# Altium PCB BCM_ECU_revA_V3.PcbDoc (part 1 of 7)
Units mm, origin at the board's own origin, x right, y up, seen from the top; angles counter-clockwise.
Board outline 109.5 x 156 mm, 4 copper layers (TOP SIG, GND, PWR, BOT SIG), stack 0.603 mm thick; 580 components, 446 nets, 1965 pads, 870 vias.
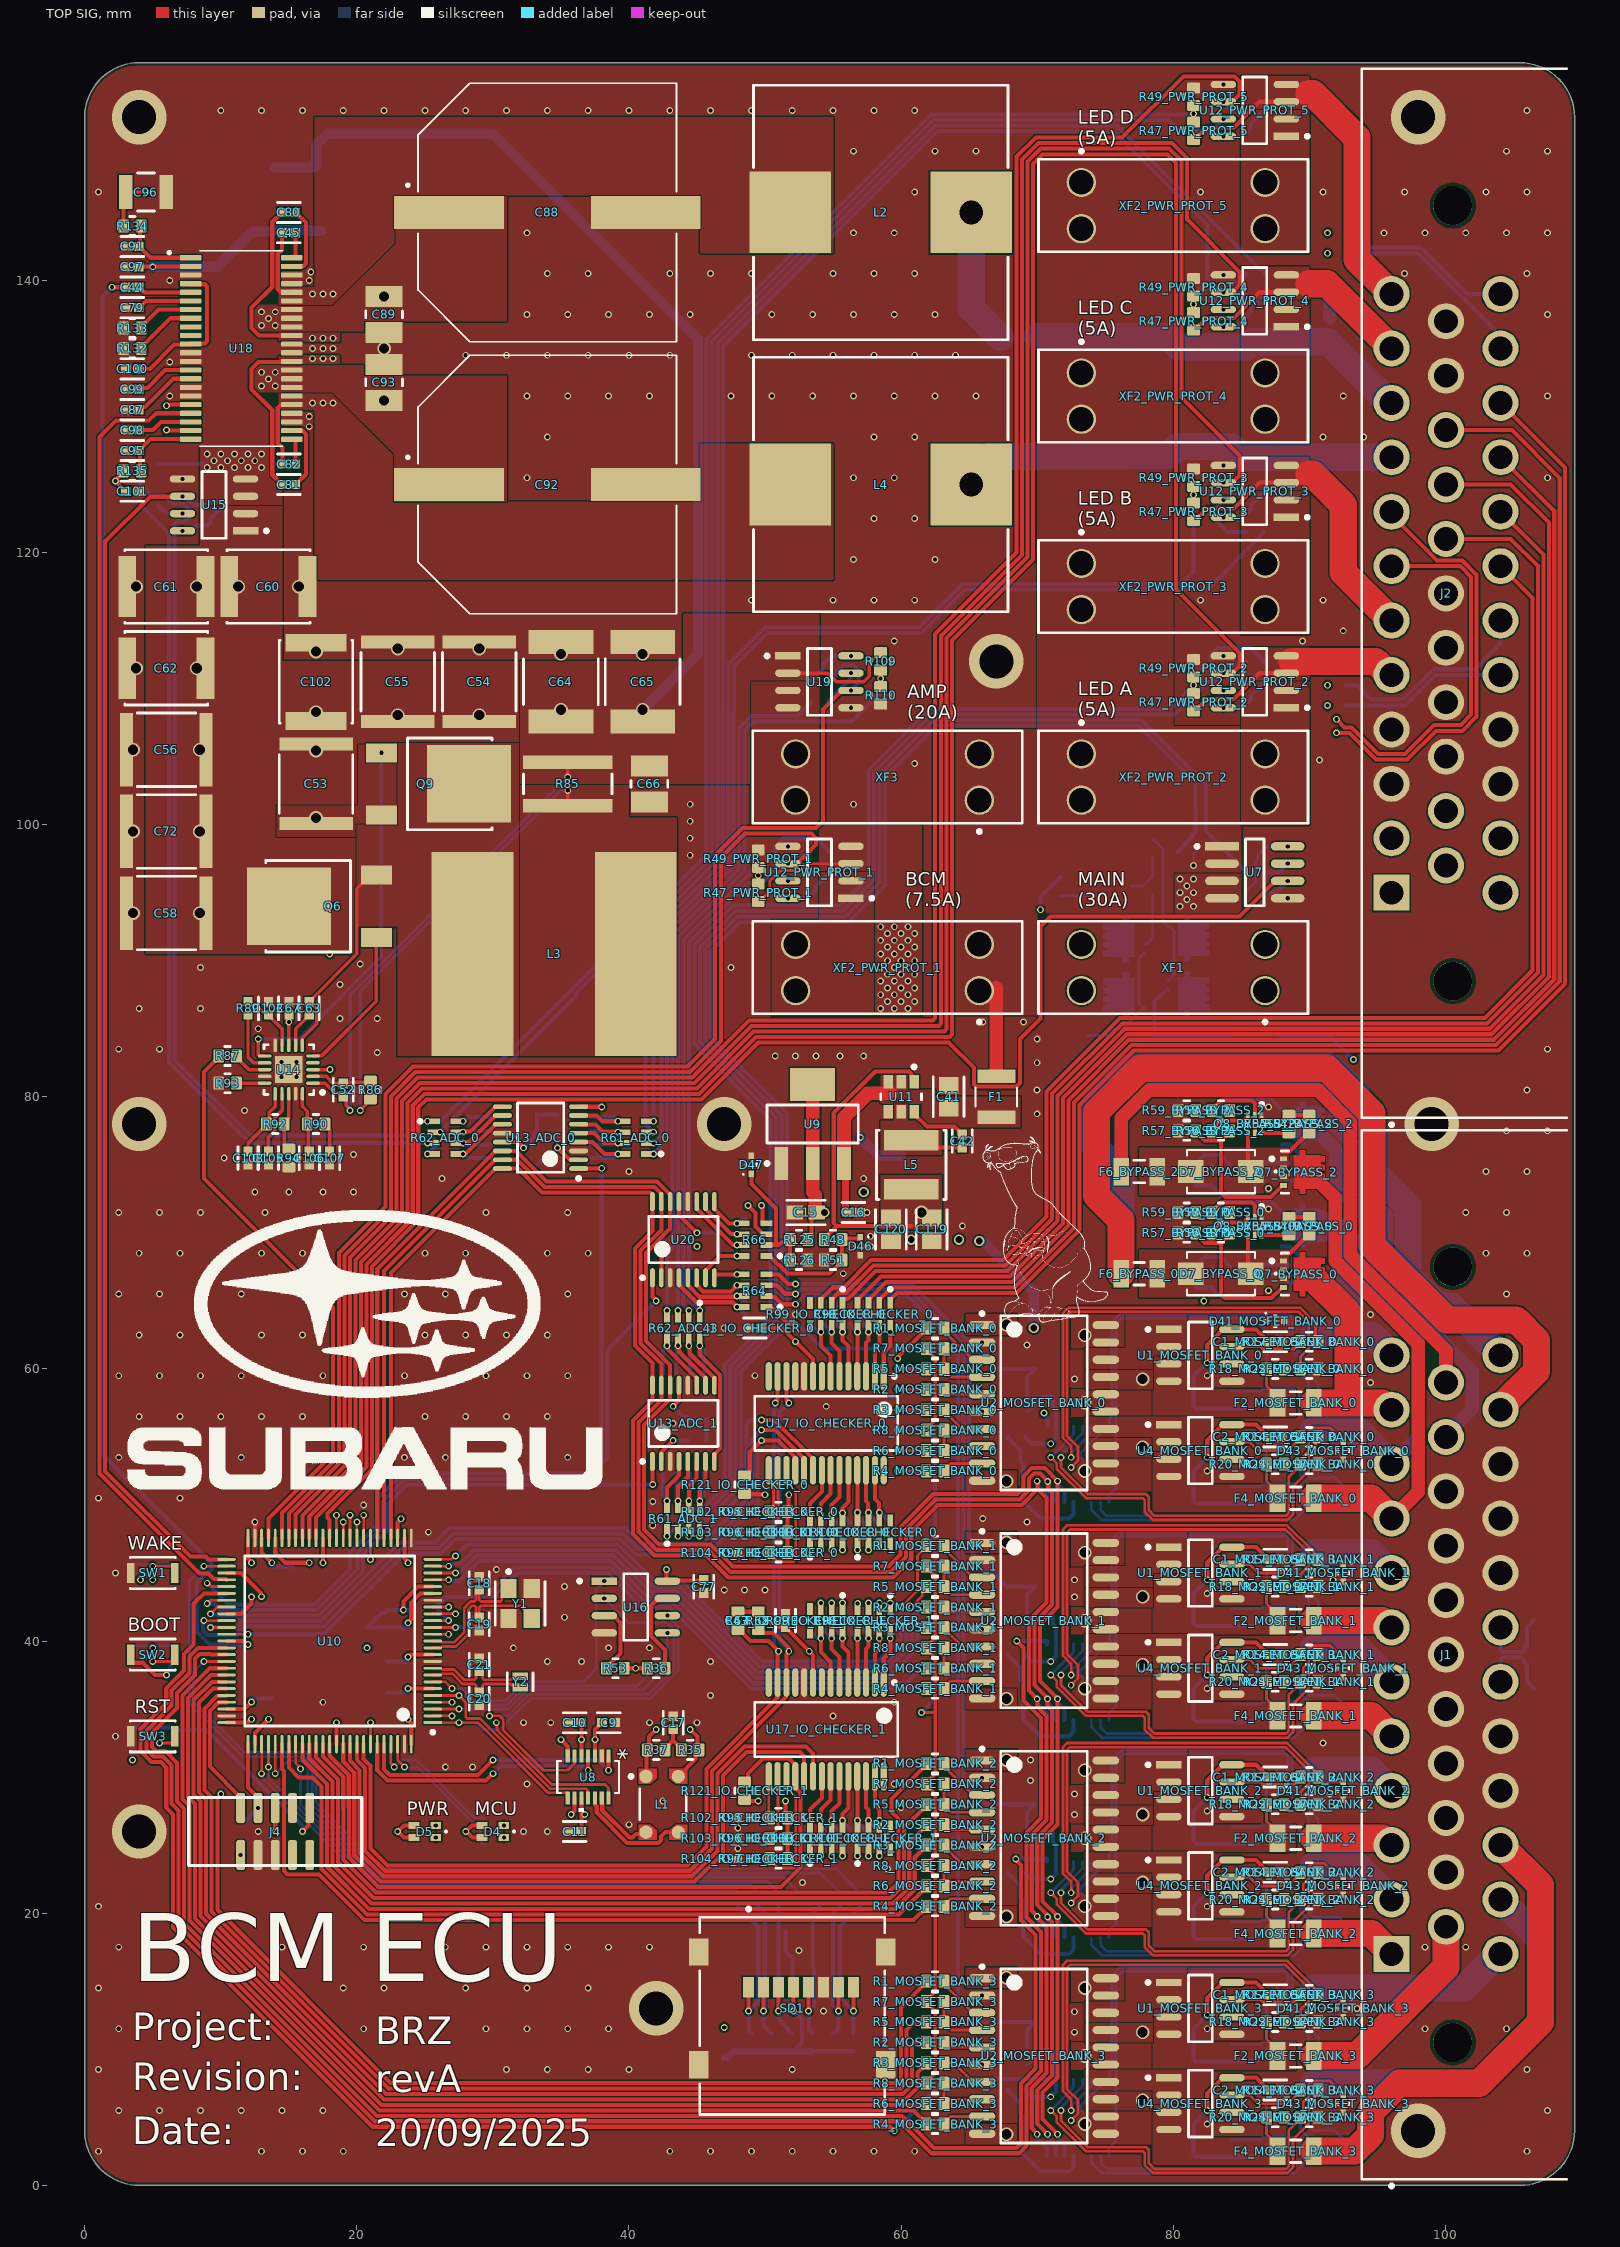
[diagram p0: TOP SIG view]
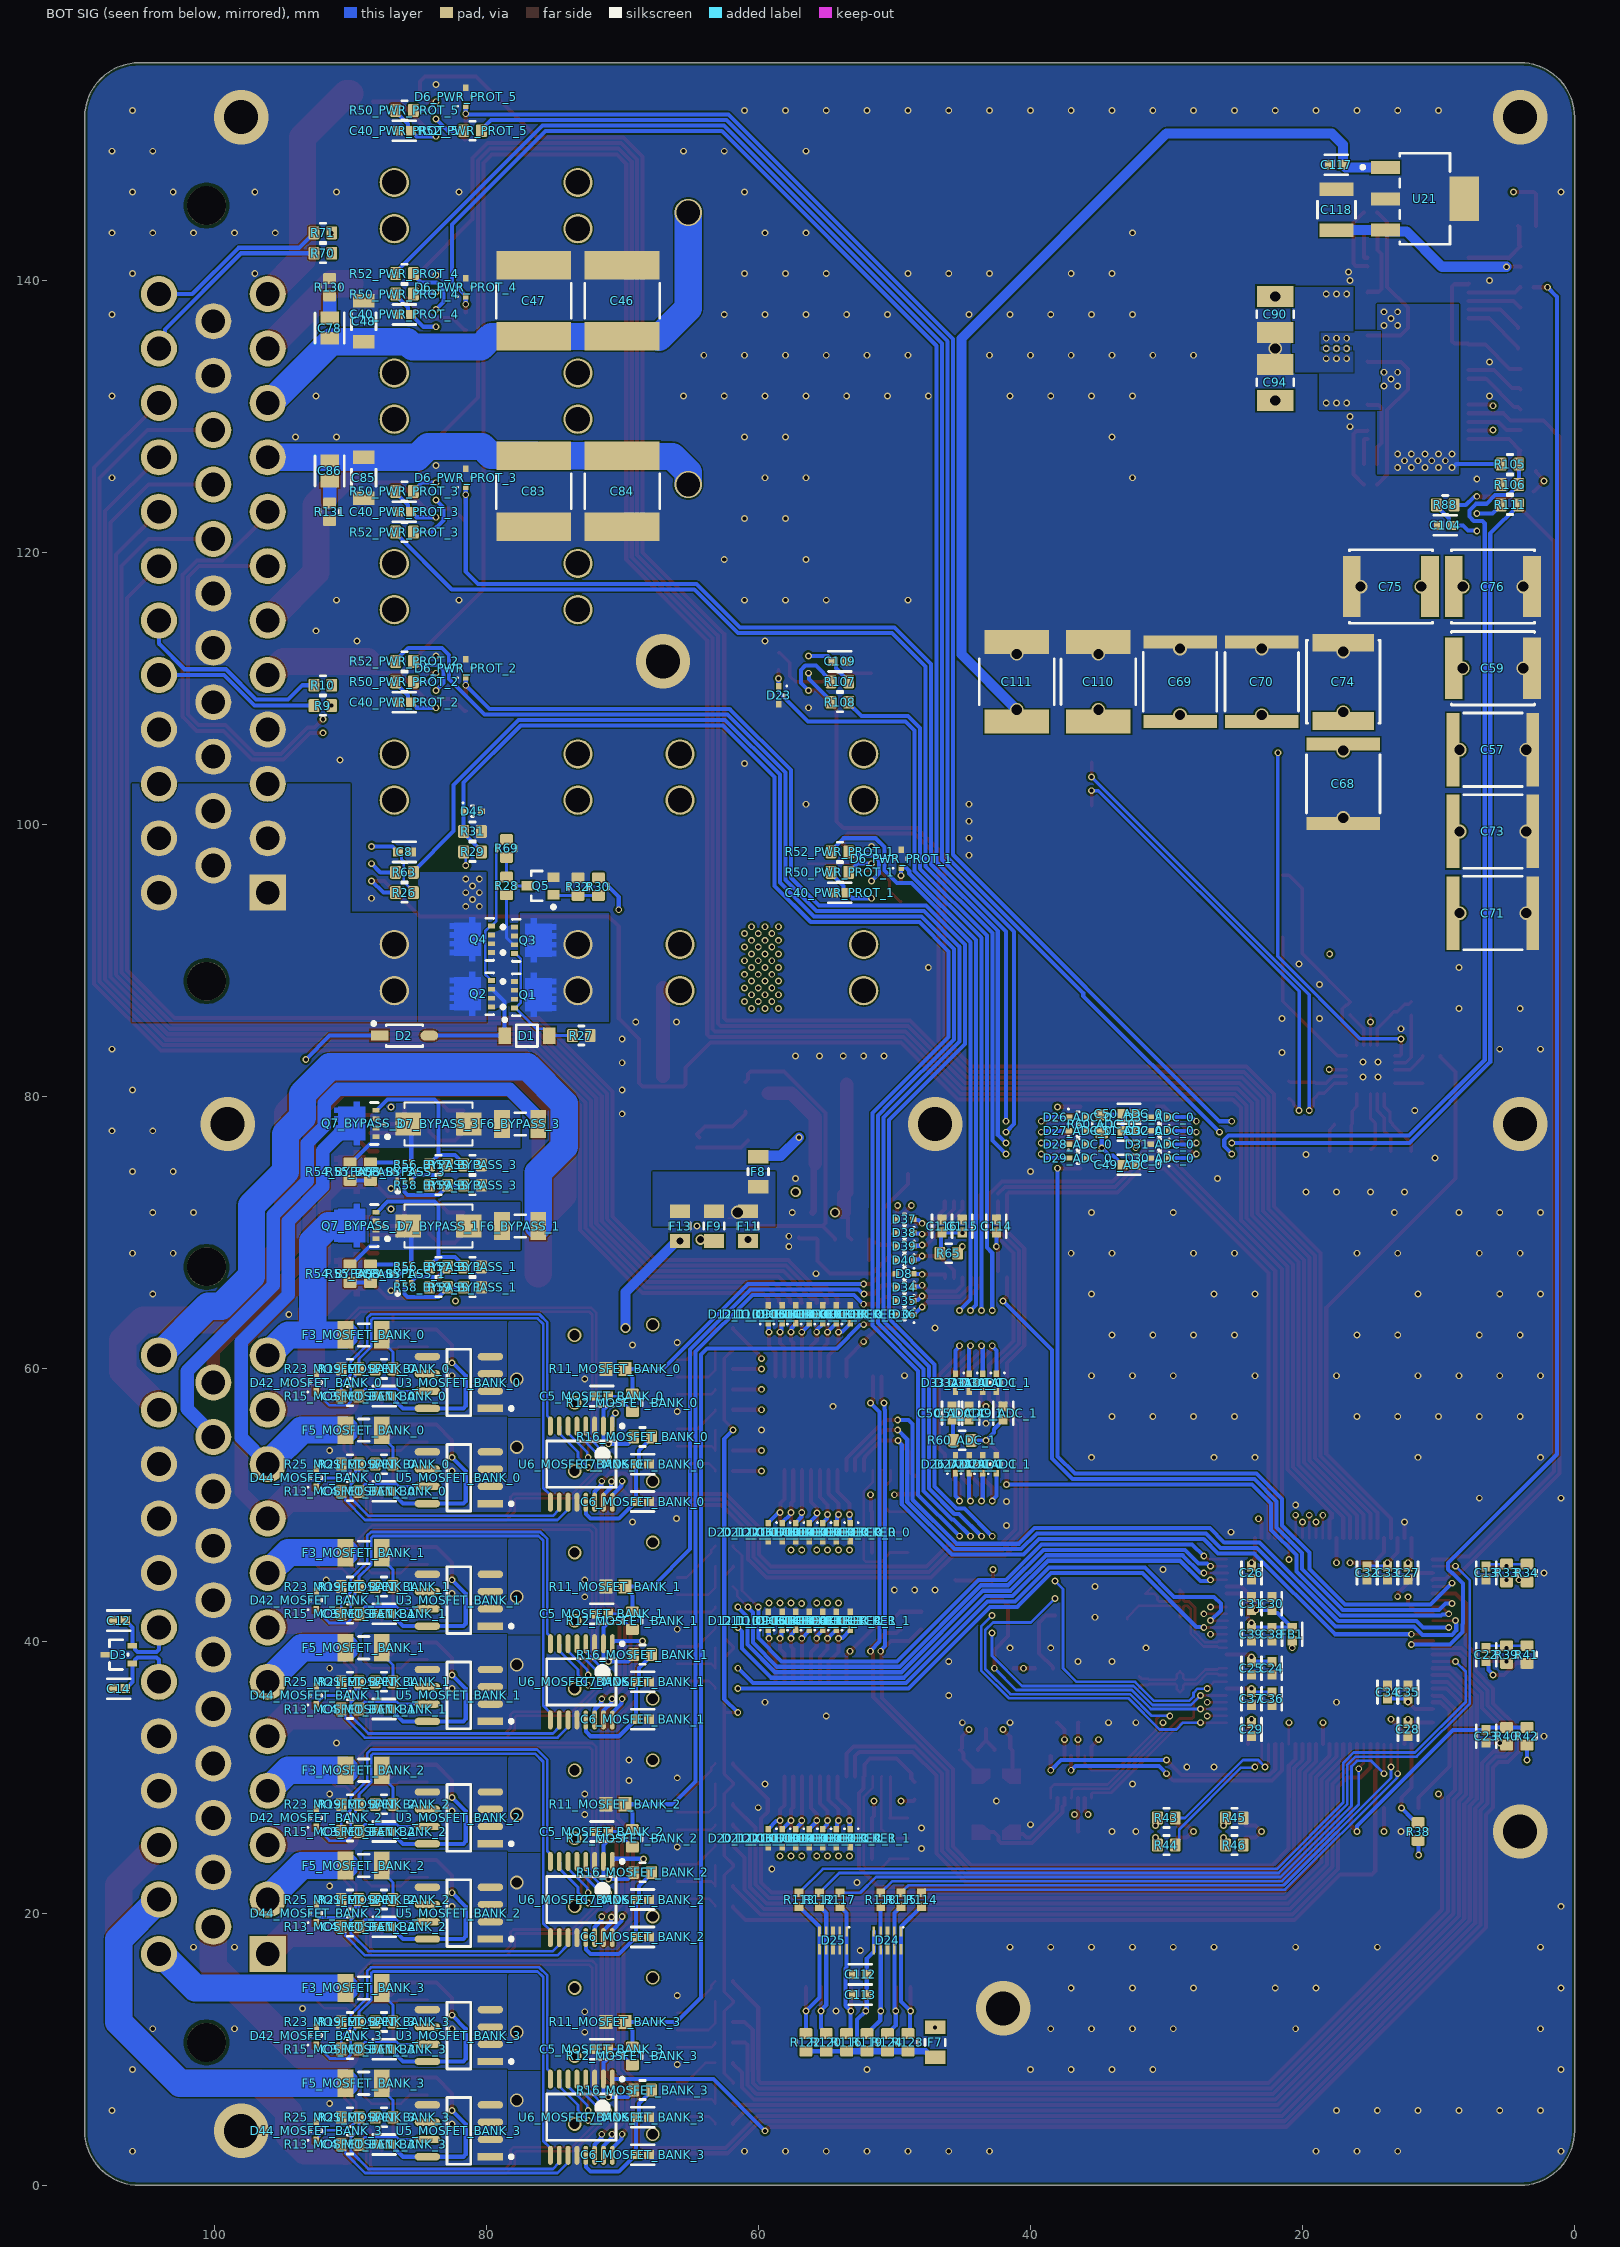
[diagram p1: BOT SIG view, seen from below]
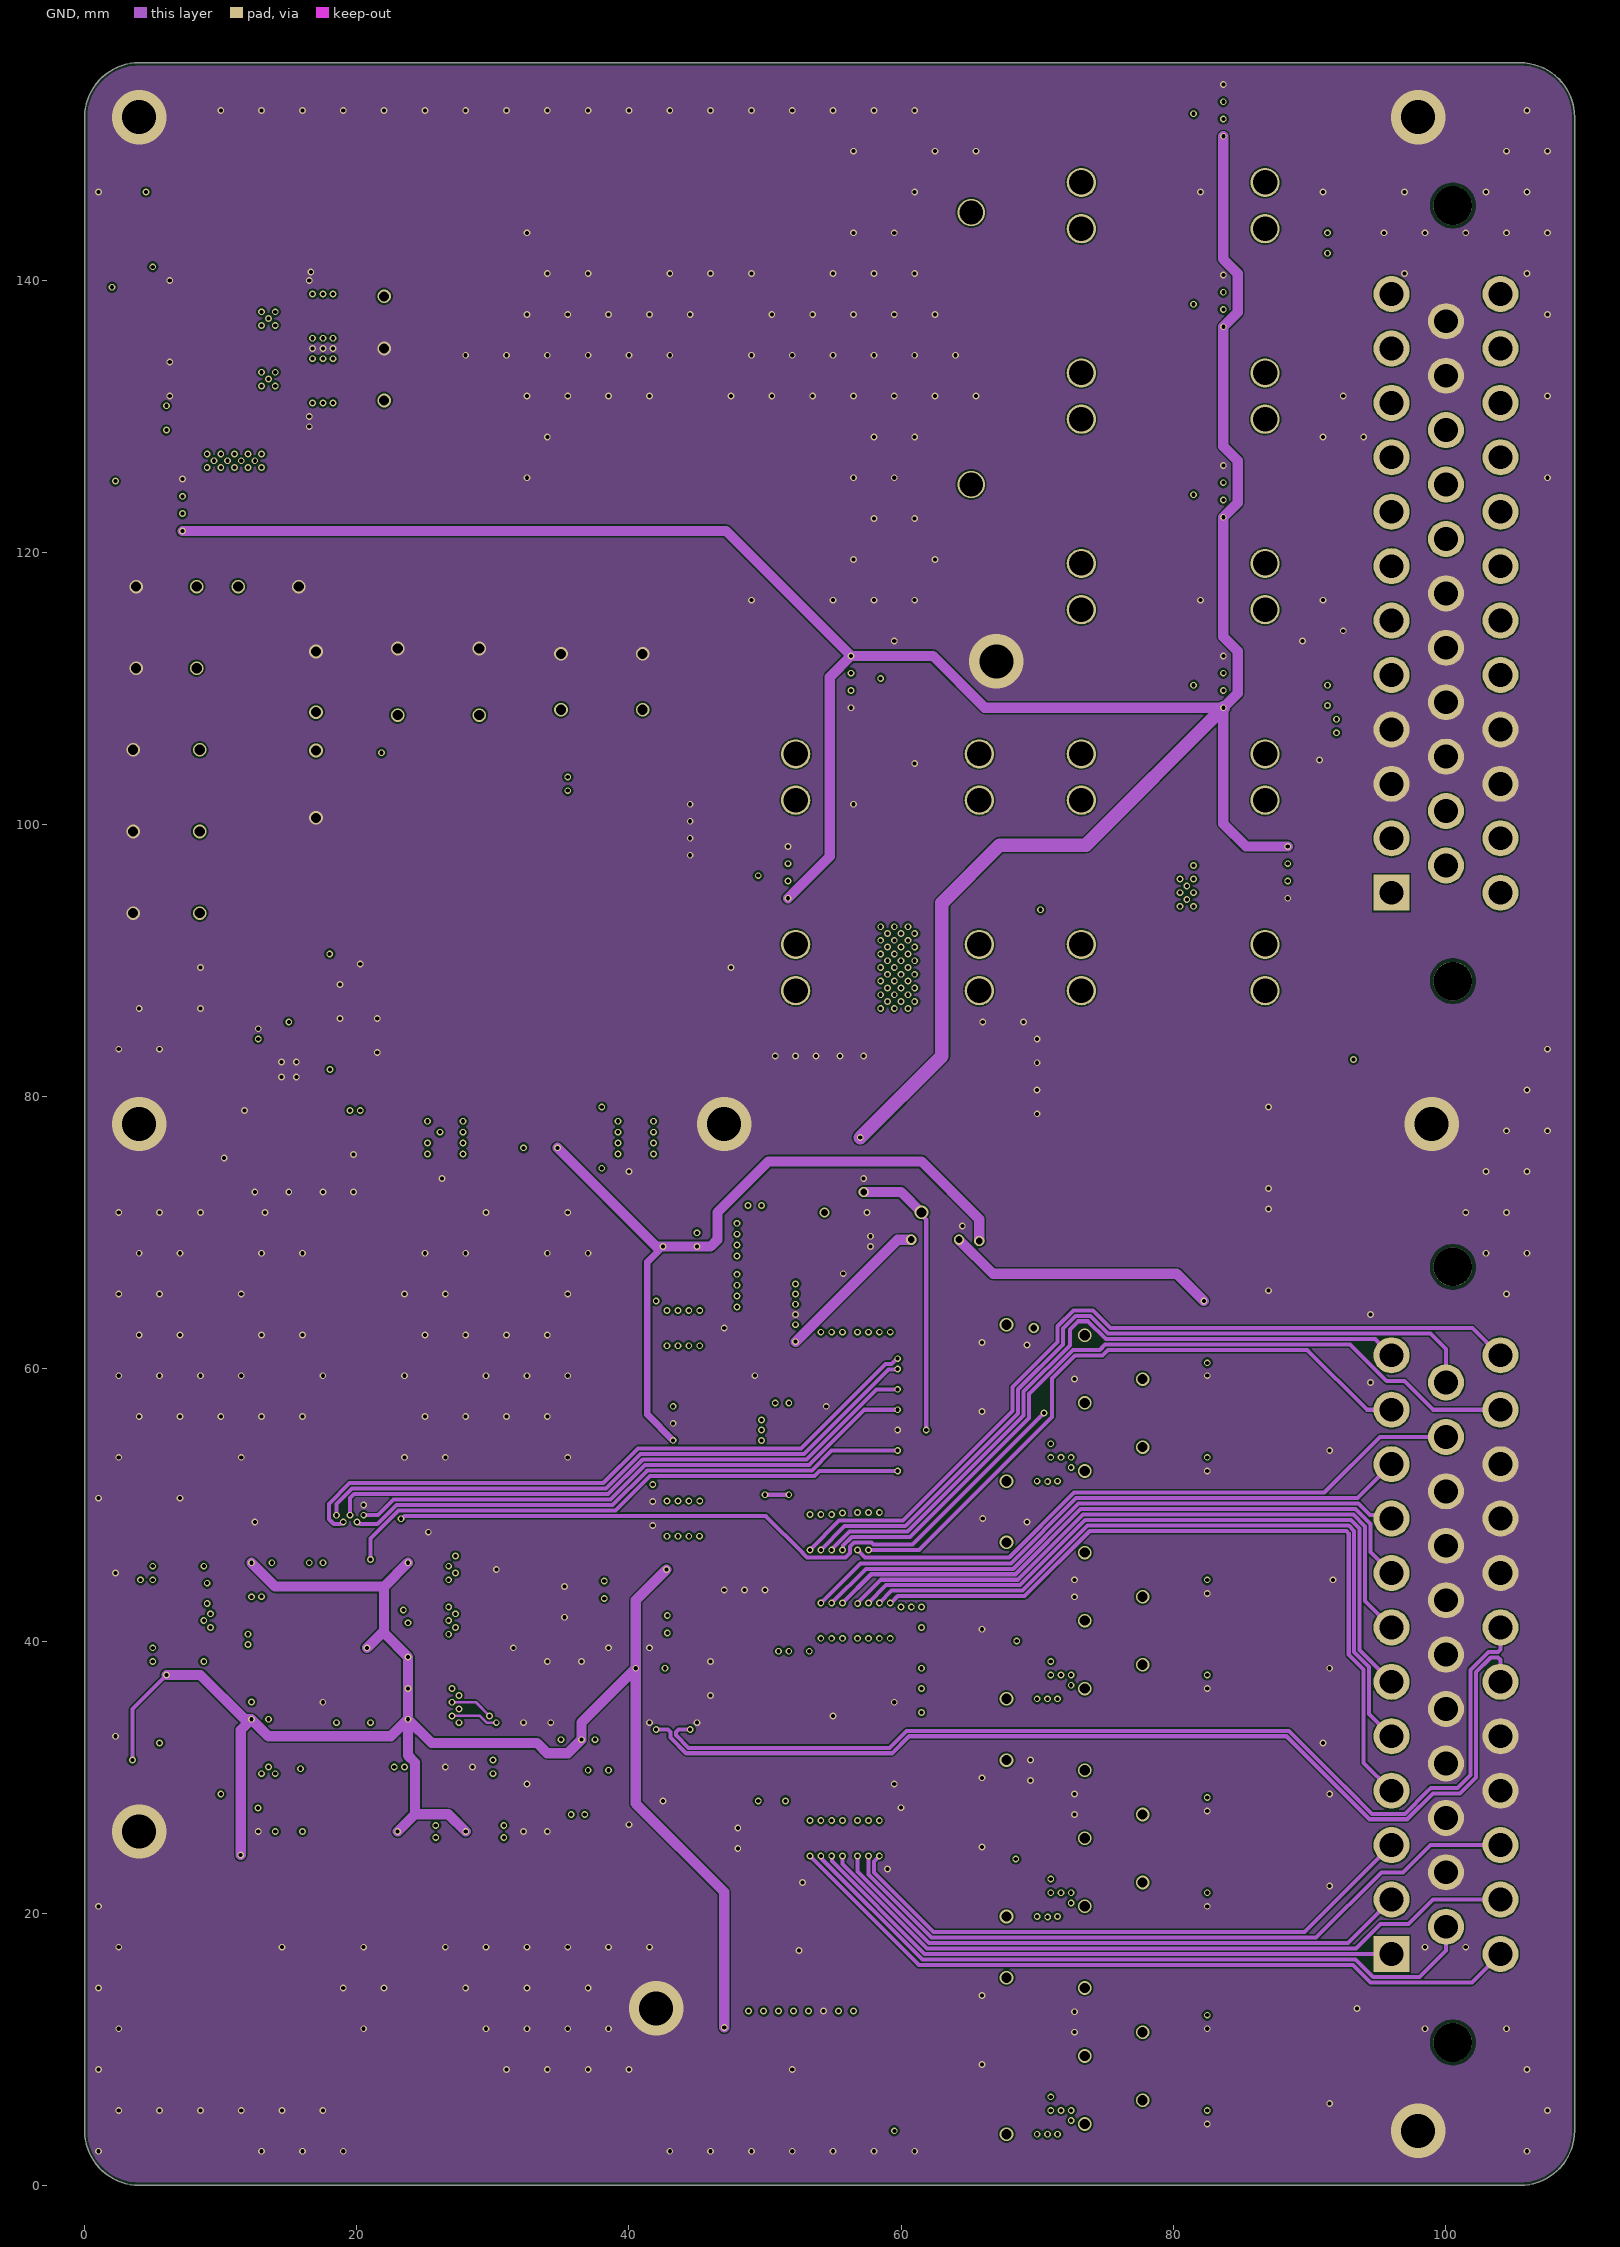
[diagram p2: GND]
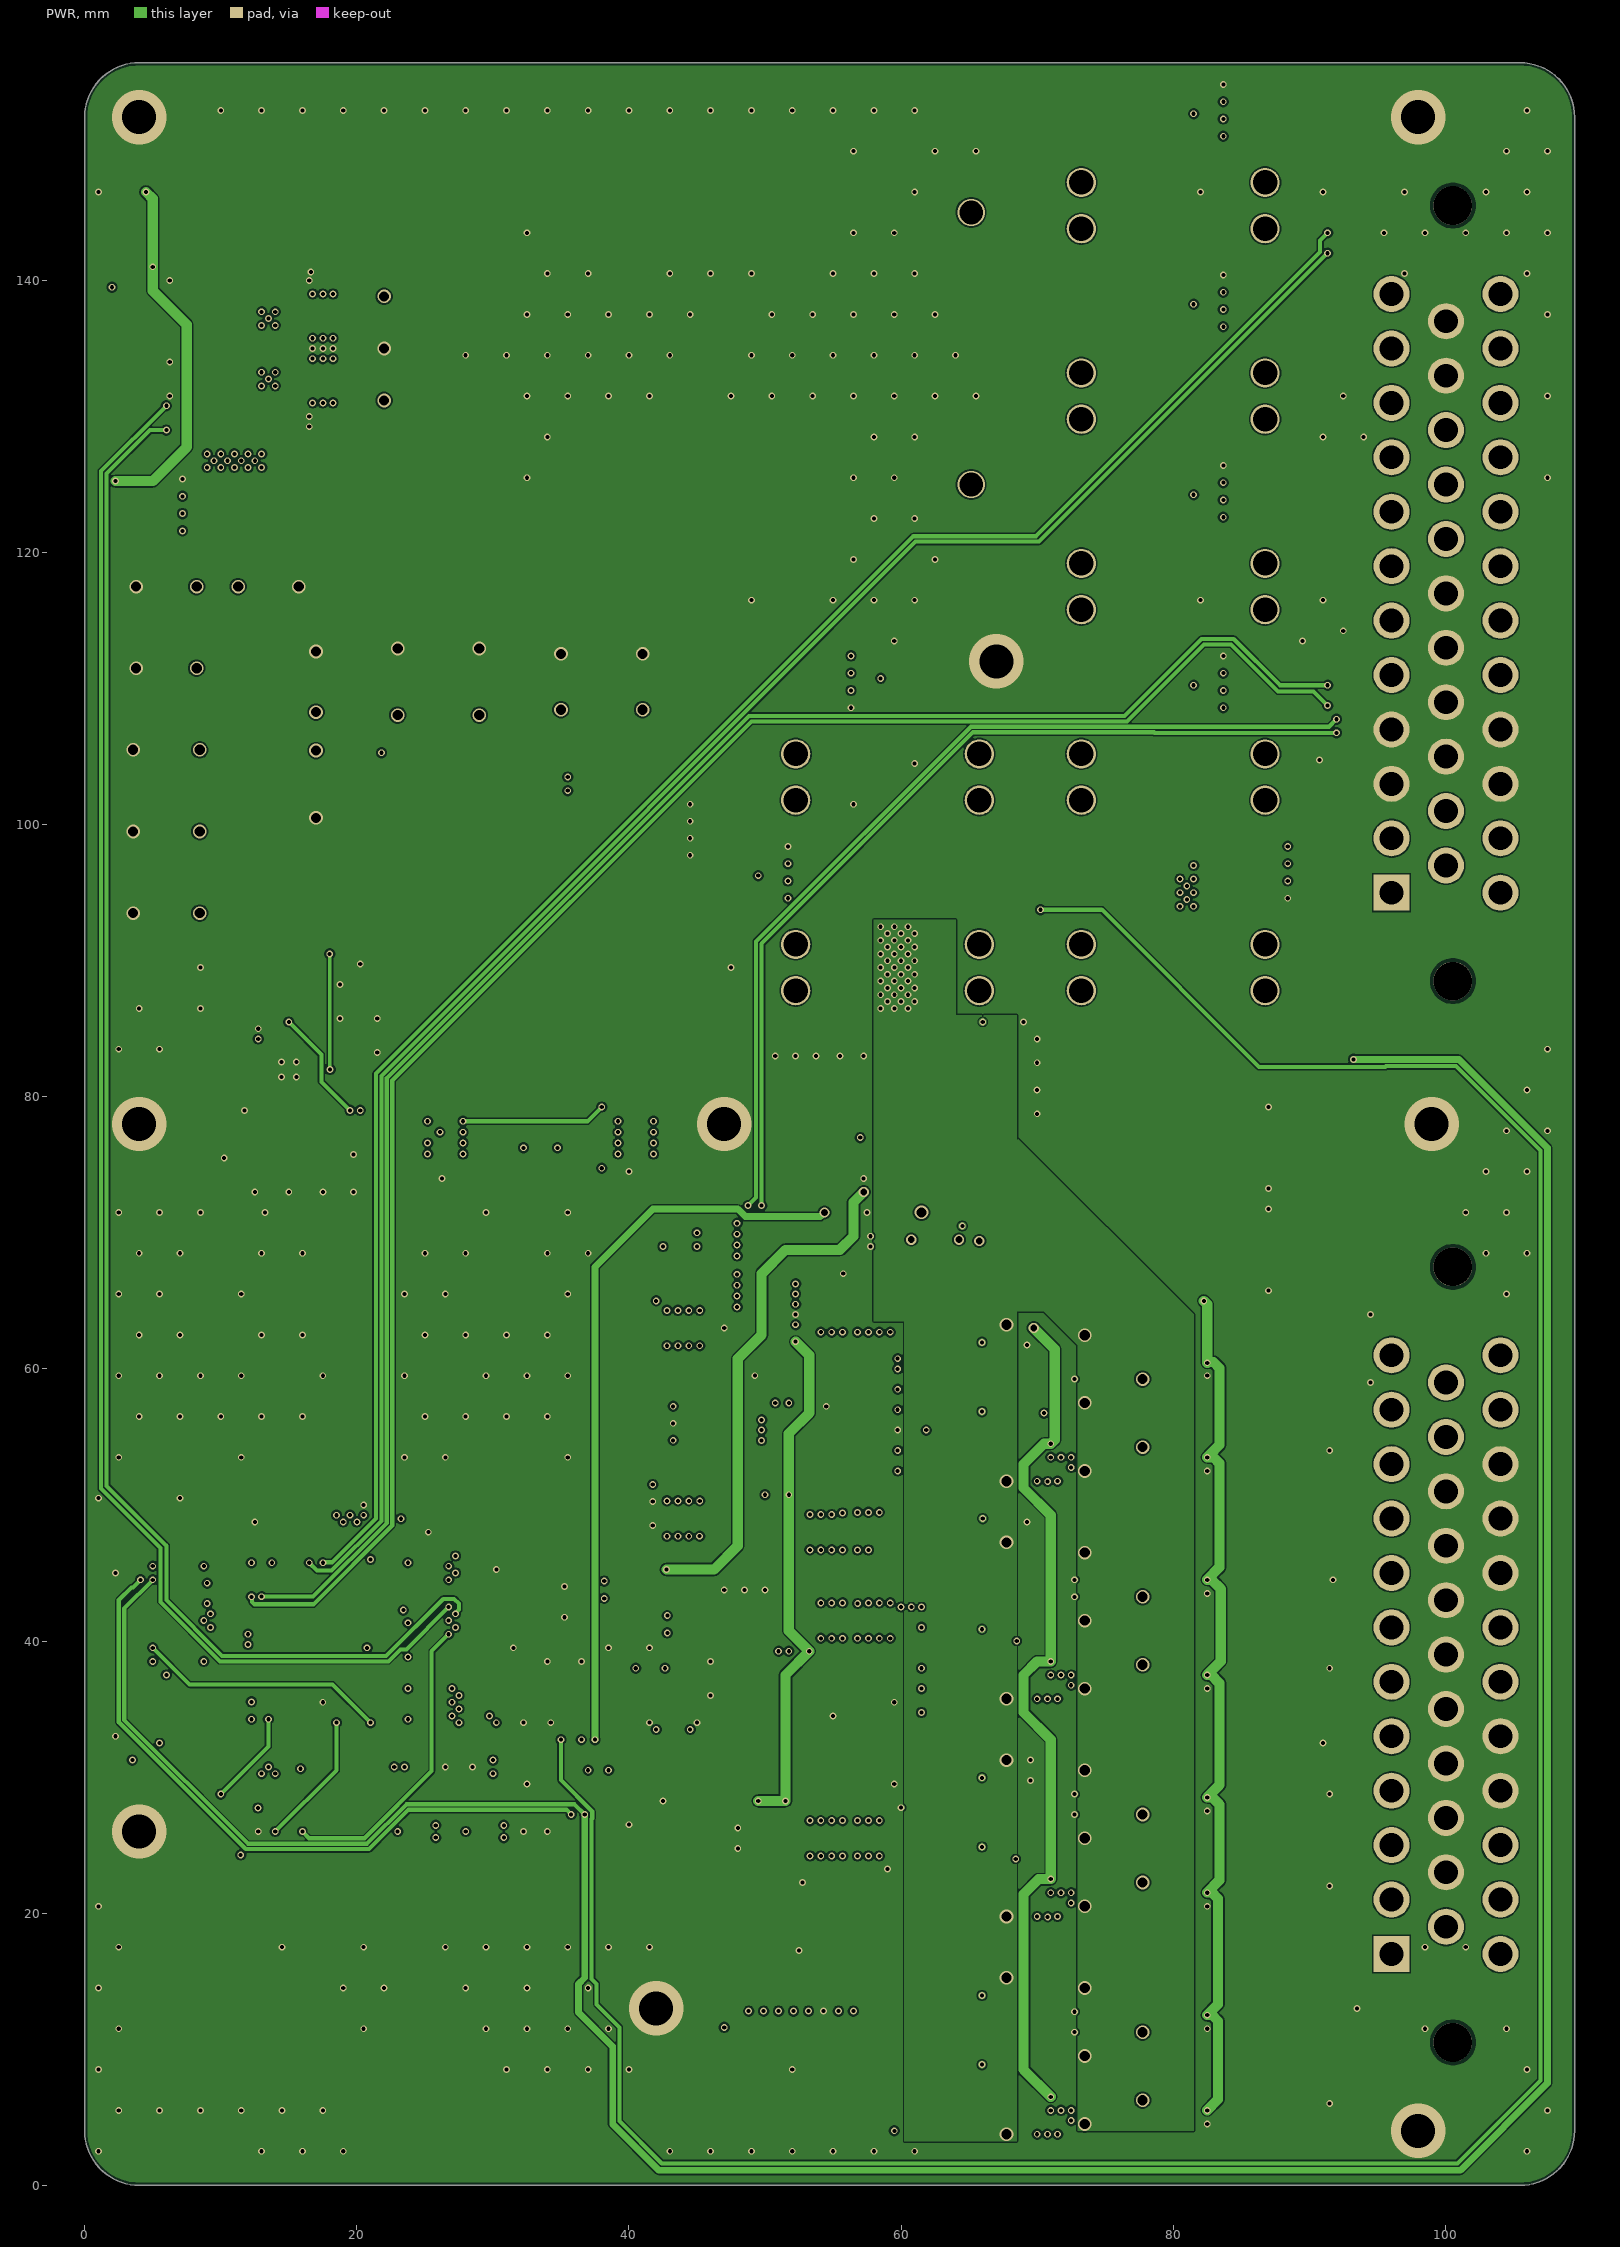
[diagram p3: PWR]
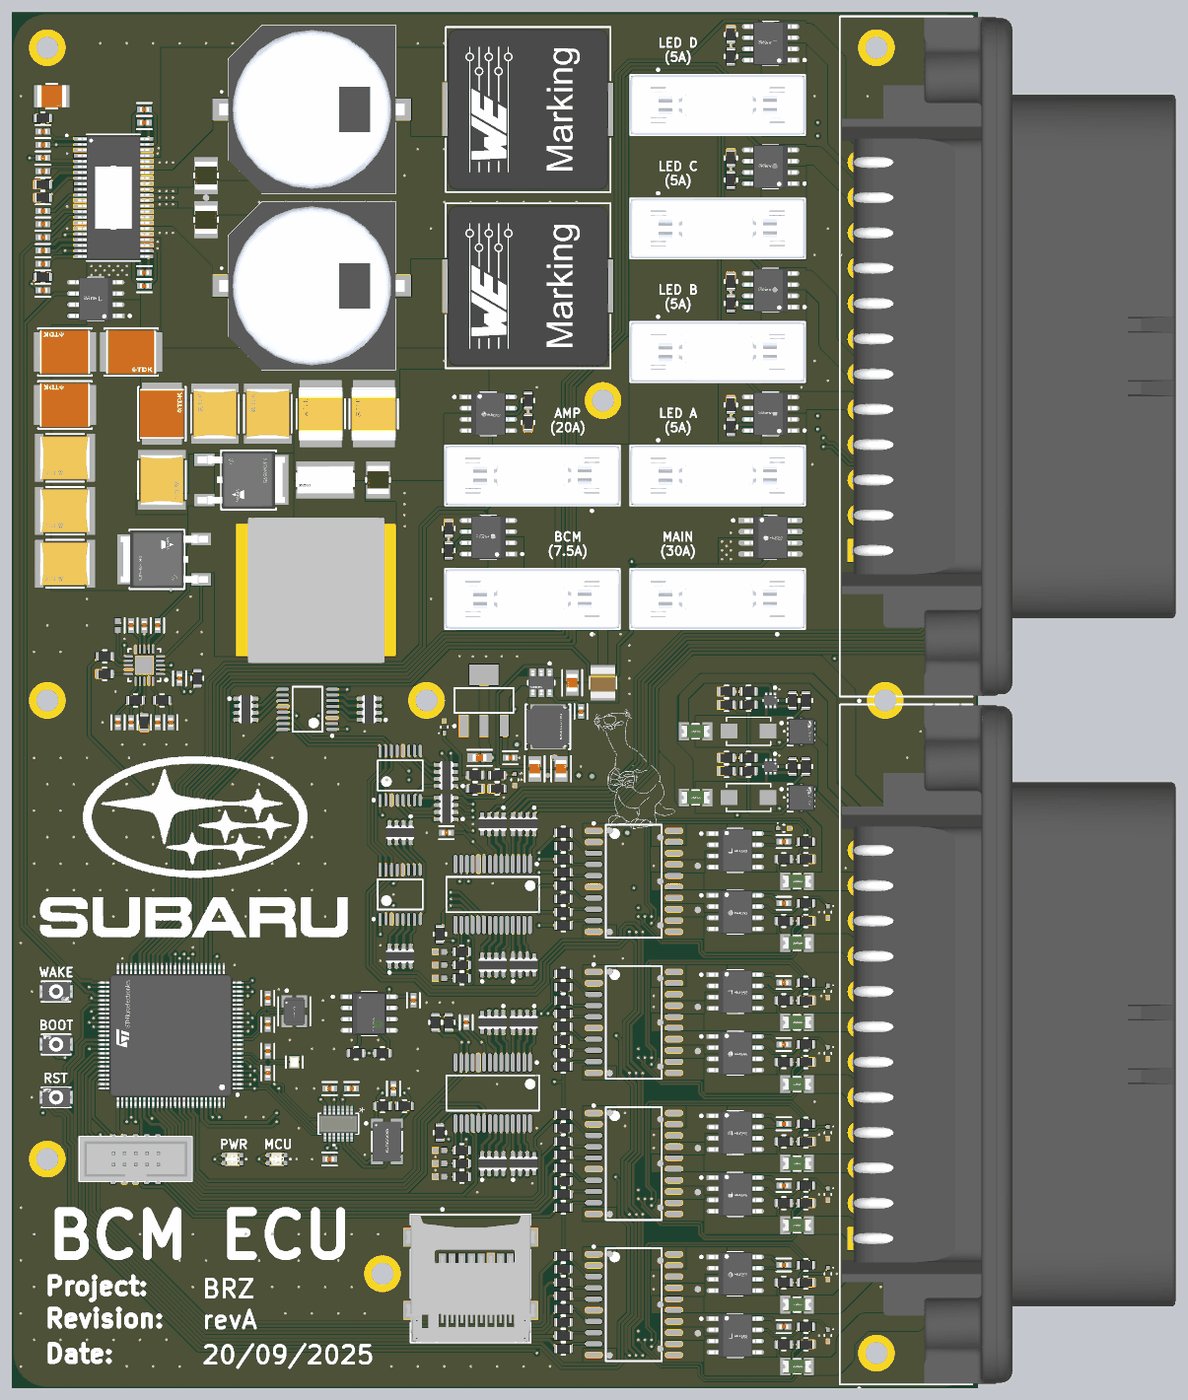
[diagram p9: 3D render of the assembled board from above, using the file's embedded part models]
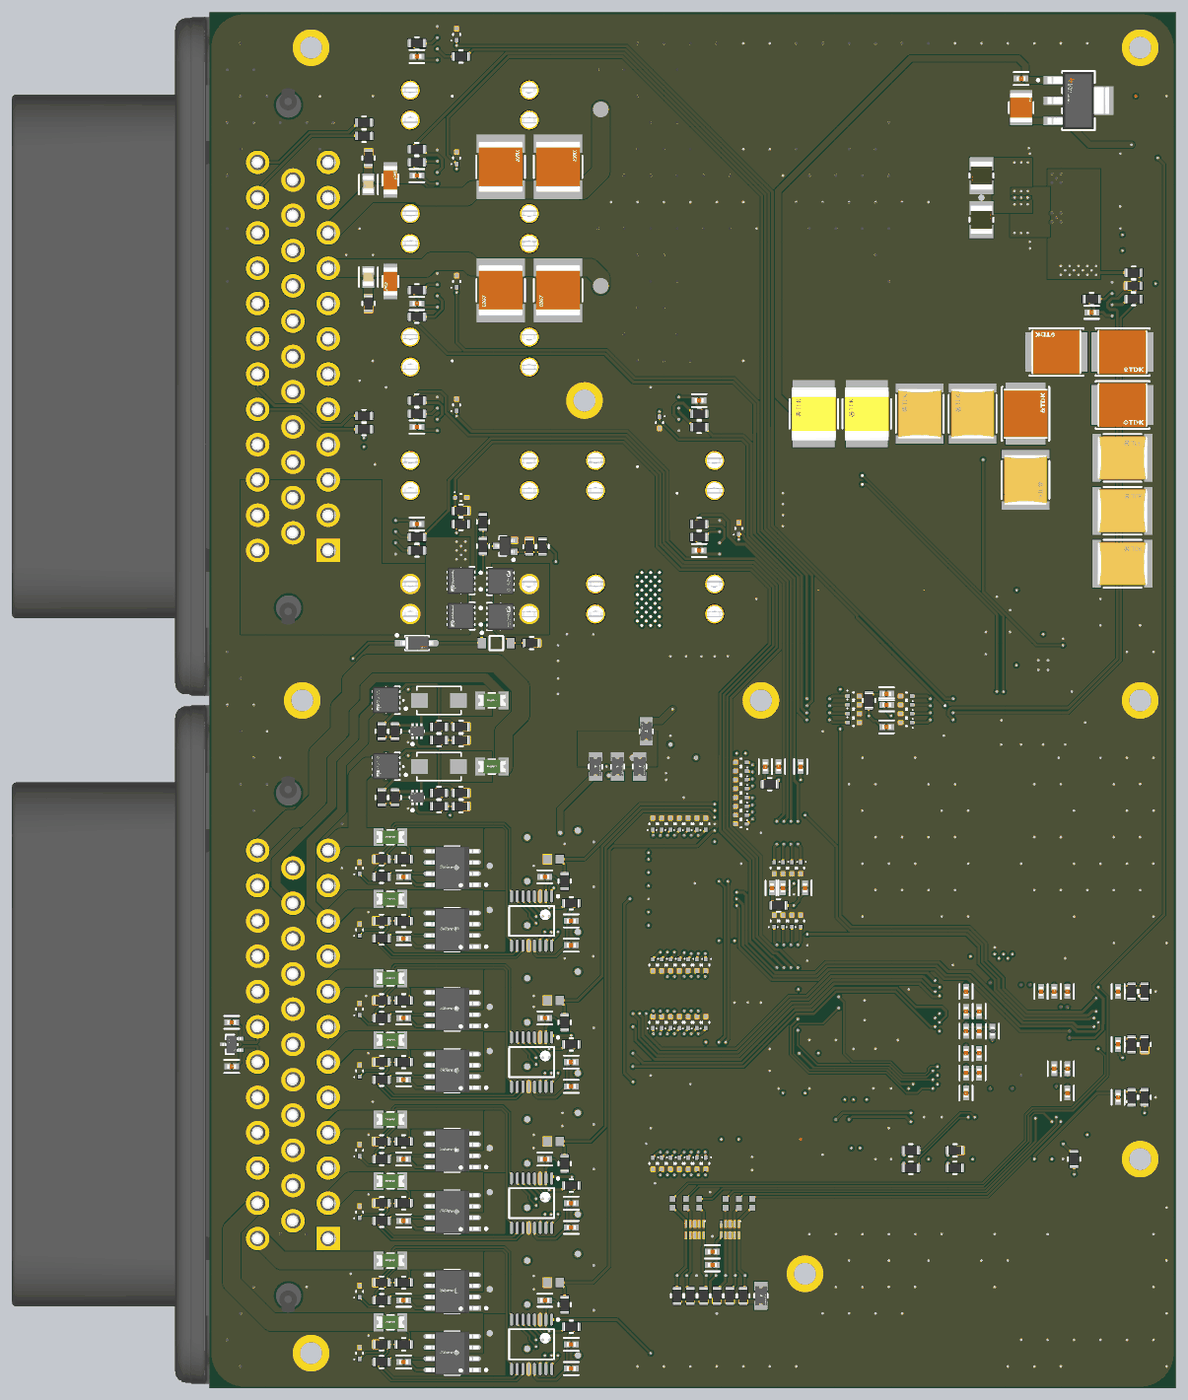
[diagram p10: 3D render of the assembled board from below, using the file's embedded part models]

## Layer stack, top to bottom
Top Solder: solder mask 0.0102, Solder Resist, Dk 3.5
TOP SIG: signal copper 0.0356
Dielectric 2: prepreg 0.0711, PP-006, Dk 4.1
GND: signal copper 0.035
Dielectric 1: dielectric 0.32, FR-4, Dk 4.8
PWR: signal copper 0.035
Dielectric 3: prepreg 0.0711, PP-006, Dk 4.1
BOT SIG: signal copper 0.0356
Bottom Solder: solder mask 0.0102, Solder Resist, Dk 3.5

## Board outline
0,4 0,152 cw(c4,152) 4,156 105.5,156 cw(c105.5,152) 109.5,152 109.5,4 cw(c105.5,4) 105.5,0 4,0 cw(c4,4)

## Design rules (kind name [scope] priority, off if disabled: settings)
BoardOutlineClearance [All] p1: gap=0.2 ignorepadtopadclearanceinfootprint=FALSE
Clearance [All] p1: gap=0.102 ignorepadtopadclearanceinfootprint=FALSE except(0.127: Via-Via Via-Fill Via-Poly Via-Region Via-Text; 0.15: Arc-Via Track-Via SMDPad-Via THPad-Via; 0.25: Arc-Hole Track-Hole SMDPad-Hole THPad-Hole Via-Hole Fill-Hole Poly-Hole Region-Hole Text-Hole)
ComponentClearance [All] p1: gap=0.102 collisioncheckmode=3 verticalgap=0.102 showdistances=TRUE
DiffPairsRouting [All] p1: maxlimit=0.102 minlimit=0.102 mostfreqgap=0.102 toplayer_minwidth=0.102 toplayer_maxwidth=1816.048 toplayer_prefwidth=0.102 midlayer1_minwidth=0.102 midlayer1_maxwidth=1816.048 midlayer1_prefwidth=0.102 midlayer2_minwidth=0.102 midlayer2_maxwidth=1816.048 midlayer2_prefwidth=0.102 bottomlayer_minwidth=0.102 bottomlayer_maxwidth=1816.048 bottomlayer_prefwidth=0.102 maxuncoupledlength=12.7
Height [All] p1: minheight=0 maxheight=1816.048 prefheight=12.7
HoleSize [All] p1: absolutevalues=TRUE maxlimit=6.3 minlimit=0.2 maxpercent=80.000 minpercent=20.000
HoleToHoleClearance [All] p1: gap=0.25 allowstackedmicrovias=FALSE
MinimumAnnularRing [All] p1: minimumring=0.076
MinimumSolderMaskSliver [All] p1: minsoldermaskwidth=0
PlaneClearance [All] p1: clearance=0.102
PlaneConnect PlaneConnectPowerPads [InPadClass('PowerPads')] p1: planeconnectstyle=Direct reliefexpansion=0.508 reliefentries=4 reliefconductorwidth=0.254 reliefairgap=0.254
PlaneConnect [All] p2: planeconnectstyle=Direct reliefexpansion=0.3 reliefentries=4 reliefconductorwidth=0.102 reliefairgap=0.102
PolygonConnect PolygonConnectPowerPads [All vs (InPadClass('PowerPads'))] p1: connectstyle=Direct reliefconductorwidth=0.254 reliefentries=4 polygonreliefangle="90 Angle" airgapwidth=0.254
PolygonConnect [All] p2: connectstyle=Direct reliefconductorwidth=0.102 reliefentries=4 polygonreliefangle="90 Angle" airgapwidth=0.102
RoutingVias [All] p1: holewidth=0.2 width=0.45 viastyle="Through Hole" minholewidth=0.2 minwidth=0.45 maxholewidth=6.3 maxwidth=6.55
SilkToSilkClearance [All] p1: silktosilkclearance=0
SilkToSolderMaskClearance [IsPad] p1: minsilkscreentomaskgap=0.102 clearancetoexposedcopper=TRUE
SolderMaskExpansion [All] p1: expansion=0.075 istentingtop=FALSE
SupplyNets "Schematic Supply Nets_9" [InNet('MOS_SENSE_3V3')] p1: voltage=0.000
SupplyNets "Schematic Supply Nets_7" [InNet('ADC_3V3')] p2: voltage=0.000
SupplyNets "Schematic Supply Nets_6" [InNet('IO_CHECKER_3V3')] p3: voltage=0.000
SupplyNets "Schematic Supply Nets_4" [InNet('PWR_SENSE_3V3')] p4: voltage=0.000
SupplyNets "Schematic Supply Nets_2" [InNet('PRE_BST_AMP_VCC')] p5: voltage=0.000
SupplyNets "Schematic Supply Nets_8" [InNet('5V')] p6: voltage=0.000
SupplyNets "Schematic Supply Nets_5" [InNet('CONN_VDD')] p7: voltage=0.000
SupplyNets "Schematic Supply Nets" [InNet('AMP_12V')] p8: voltage=0.000
SupplyNets "Schematic Supply Nets_18" [InNet('LED_C')] p9: voltage=0.000
SupplyNets "Schematic Supply Nets_17" [InNet('LED_D')] p10: voltage=0.000
SupplyNets "Schematic Supply Nets_16" [InNet('LED_B')] p11: voltage=0.000
SupplyNets "Schematic Supply Nets_14" [InNet('LED_A')] p12: voltage=0.000
SupplyNets "Schematic Supply Nets_13" [InNet('PWR_OUT')] p13: voltage=0.000
SupplyNets "Schematic Supply Nets_11" [InNet('3V3')] p14: voltage=0.000
SupplyNets "Schematic Supply Nets_10" [InNet('PWR_IN')] p15: voltage=0.000
SupplyNets "Schematic Supply Nets_3" [InNet('GND')] p16: voltage=0.000
SupplyNets "Schematic Supply Nets_1" [InNet('BCM_VCC')] p17: voltage=0.000
Width [All] p1: maxlimit=1816.048 minlimit=0.102 preferedwidth=0.102
20 further rules are at their usual default settings.

## Classes and differential pairs
component class ADC_2: C114 C115 C116 D8 D34 D35 D36 D37 D38 D39 D40 R64 R65 R66 U20
component class MEM_1: C112 C113 D24 D25 F7 R112 R113 R114 R115 R116 R117 R118 R119 R120 R122 R123 R124 SD1
channel class PWR_PROT: PWR_PROT_1 PWR_PROT_2 PWR_PROT_3 PWR_PROT_4 PWR_PROT_5
component class PWR_PROT_5: C40_PWR_PROT_5 D6_PWR_PROT_5 R47_PWR_PROT_5 R49_PWR_PROT_5 R50_PWR_PROT_5 R52_PWR_PROT_5 U12_PWR_PROT_5 XF2_PWR_PROT_5
component class PWR_PROT_4: C40_PWR_PROT_4 D6_PWR_PROT_4 R47_PWR_PROT_4 R49_PWR_PROT_4 R50_PWR_PROT_4 R52_PWR_PROT_4 U12_PWR_PROT_4 XF2_PWR_PROT_4
component class PWR_PROT_3: C40_PWR_PROT_3 D6_PWR_PROT_3 R47_PWR_PROT_3 R49_PWR_PROT_3 R50_PWR_PROT_3 R52_PWR_PROT_3 U12_PWR_PROT_3 XF2_PWR_PROT_3
component class PWR_PROT_2: C40_PWR_PROT_2 D6_PWR_PROT_2 R47_PWR_PROT_2 R49_PWR_PROT_2 R50_PWR_PROT_2 R52_PWR_PROT_2 U12_PWR_PROT_2 XF2_PWR_PROT_2
component class PWR_PROT_1: C40_PWR_PROT_1 D6_PWR_PROT_1 R47_PWR_PROT_1 R49_PWR_PROT_1 R50_PWR_PROT_1 R52_PWR_PROT_1 U12_PWR_PROT_1 XF2_PWR_PROT_1
differential pair class CAN: CAN PRE_CAN
channel class MCP23017_PINOUT: IO_CHECKER_0 IO_CHECKER_1
component class IO_CHECKER_1: C43_IO_CHECKER_1 D9_IO_CHECKER_1 D10_IO_CHECKER_1 D11_IO_CHECKER_1 D12_IO_CHECKER_1 D13_IO_CHECKER_1 D14_IO_CHECKER_1 D15_IO_CHECKER_1 D16_IO_CHECKER_1 D17_IO_CHECKER_1 D18_IO_CHECKER_1 D19_IO_CHECKER_1 D20_IO_CHECKER_1 D21_IO_CHECKER_1 D22_IO_CHECKER_1 R95_IO_CHECKER_1 R96_IO_CHECKER_1 R97_IO_CHECKER_1 R98_IO_CHECKER_1 R99_IO_CHECKER_1 R100_IO_CHECKER_1 R101_IO_CHECKER_1 R102_IO_CHECKER_1 R103_IO_CHECKER_1 R104_IO_CHECKER_1 R121_IO_CHECKER_1 U17_IO_CHECKER_1
component class IO_CHECKER_0: C43_IO_CHECKER_0 D9_IO_CHECKER_0 D10_IO_CHECKER_0 D11_IO_CHECKER_0 D12_IO_CHECKER_0 D13_IO_CHECKER_0 D14_IO_CHECKER_0 D15_IO_CHECKER_0 D16_IO_CHECKER_0 D17_IO_CHECKER_0 D18_IO_CHECKER_0 D19_IO_CHECKER_0 D20_IO_CHECKER_0 D21_IO_CHECKER_0 D22_IO_CHECKER_0 R95_IO_CHECKER_0 R96_IO_CHECKER_0 R97_IO_CHECKER_0 R98_IO_CHECKER_0 R99_IO_CHECKER_0 R100_IO_CHECKER_0 R101_IO_CHECKER_0 R102_IO_CHECKER_0 R103_IO_CHECKER_0 R104_IO_CHECKER_0 R121_IO_CHECKER_0 U17_IO_CHECKER_0
component class AMP_0: C44 C45 C46 C47 C48 C78 C79 C80 C81 C82 C83 C84 C85 C86 C87 C88 C89 C90 C91 C92 C93 C94 C95 C96 C97 C98 C99 C100 C101 C117 C118 L2 L4 R130 R131 R132 R133 R134 R135 U18 U21
channel class ADC088S022: ADC_0 ADC_1
component class PWR_PROT_0: C40 C109 D6 D23 R47 R49 R50 R52 R107 R108 R109 R110 U12 U19 XF2 XF3
component class INT_REG_0: C15 C16 C41 C42 C119 C120 D46 D47 L5 R48 R51 R125 R126 U9 U11
component class ADC_1: C49_ADC_1 C50_ADC_1 C51_ADC_1 D26_ADC_1 D27_ADC_1 D28_ADC_1 D29_ADC_1 D30_ADC_1 D31_ADC_1 D32_ADC_1 D33_ADC_1 R60_ADC_1 R61_ADC_1 R62_ADC_1 U13_ADC_1
component class MEM_0: C77 R36 R53 U16
component class AMP_REG_0: C52 C53 C54 C55 C56 C57 C58 C59 C60 C61 C62 C63 C64 C65 C66 C67 C68 C69 C70 C71 C72 C73 C74 C75 C76 C102 C103 C104 C105 C106 C107 C108 C110 C111 L3 Q6 Q9 R85 R86 R87 R88 R89 R90 R92 R93 R94 R105 R106 R111 U14 U15
channel class MOSFET_BANK: MOSFET_BANK_0 MOSFET_BANK_1 MOSFET_BANK_2 MOSFET_BANK_3
channel class BYPASS_BLOCK: BYPASS_0 BYPASS_1 BYPASS_2 BYPASS_3
component class PWR_MGMT: C8 C9 C10 C11 C12 C13 C14 C17 D1 D2 D3 D45 L1 Q1 Q2 Q3 Q4 Q5 Q7 R26 R27 R28 R29 R30 R31 R32 R33 R34 R35 R37 R63 R69 SW1 U7 U8
component class MOSFET_BANK_3: C1_MOSFET_BANK_3 C2_MOSFET_BANK_3 C3_MOSFET_BANK_3 C4_MOSFET_BANK_3 C5_MOSFET_BANK_3 C6_MOSFET_BANK_3 C7_MOSFET_BANK_3 D41_MOSFET_BANK_3 D42_MOSFET_BANK_3 D43_MOSFET_BANK_3 D44_MOSFET_BANK_3 F2_MOSFET_BANK_3 F3_MOSFET_BANK_3 F4_MOSFET_BANK_3 F5_MOSFET_BANK_3 R1_MOSFET_BANK_3 R2_MOSFET_BANK_3 R3_MOSFET_BANK_3 R4_MOSFET_BANK_3 R5_MOSFET_BANK_3 R6_MOSFET_BANK_3 R7_MOSFET_BANK_3 R8_MOSFET_BANK_3 R11_MOSFET_BANK_3 R12_MOSFET_BANK_3 R13_MOSFET_BANK_3 R14_MOSFET_BANK_3 R15_MOSFET_BANK_3 R16_MOSFET_BANK_3 R17_MOSFET_BANK_3 R18_MOSFET_BANK_3 R19_MOSFET_BANK_3 R20_MOSFET_BANK_3 R21_MOSFET_BANK_3 R22_MOSFET_BANK_3 R23_MOSFET_BANK_3 R24_MOSFET_BANK_3 R25_MOSFET_BANK_3 U1_MOSFET_BANK_3 U2_MOSFET_BANK_3 U3_MOSFET_BANK_3 U4_MOSFET_BANK_3 U5_MOSFET_BANK_3 U6_MOSFET_BANK_3
component class MOSFET_BANK_2: C1_MOSFET_BANK_2 C2_MOSFET_BANK_2 C3_MOSFET_BANK_2 C4_MOSFET_BANK_2 C5_MOSFET_BANK_2 C6_MOSFET_BANK_2 C7_MOSFET_BANK_2 D41_MOSFET_BANK_2 D42_MOSFET_BANK_2 D43_MOSFET_BANK_2 D44_MOSFET_BANK_2 F2_MOSFET_BANK_2 F3_MOSFET_BANK_2 F4_MOSFET_BANK_2 F5_MOSFET_BANK_2 R1_MOSFET_BANK_2 R2_MOSFET_BANK_2 R3_MOSFET_BANK_2 R4_MOSFET_BANK_2 R5_MOSFET_BANK_2 R6_MOSFET_BANK_2 R7_MOSFET_BANK_2 R8_MOSFET_BANK_2 R11_MOSFET_BANK_2 R12_MOSFET_BANK_2 R13_MOSFET_BANK_2 R14_MOSFET_BANK_2 R15_MOSFET_BANK_2 R16_MOSFET_BANK_2 R17_MOSFET_BANK_2 R18_MOSFET_BANK_2 R19_MOSFET_BANK_2 R20_MOSFET_BANK_2 R21_MOSFET_BANK_2 R22_MOSFET_BANK_2 R23_MOSFET_BANK_2 R24_MOSFET_BANK_2 R25_MOSFET_BANK_2 U1_MOSFET_BANK_2 U2_MOSFET_BANK_2 U3_MOSFET_BANK_2 U4_MOSFET_BANK_2 U5_MOSFET_BANK_2 U6_MOSFET_BANK_2
component class MOSFET_BANK_1: C1_MOSFET_BANK_1 C2_MOSFET_BANK_1 C3_MOSFET_BANK_1 C4_MOSFET_BANK_1 C5_MOSFET_BANK_1 C6_MOSFET_BANK_1 C7_MOSFET_BANK_1 D41_MOSFET_BANK_1 D42_MOSFET_BANK_1 D43_MOSFET_BANK_1 D44_MOSFET_BANK_1 F2_MOSFET_BANK_1 F3_MOSFET_BANK_1 F4_MOSFET_BANK_1 F5_MOSFET_BANK_1 R1_MOSFET_BANK_1 R2_MOSFET_BANK_1 R3_MOSFET_BANK_1 R4_MOSFET_BANK_1 R5_MOSFET_BANK_1 R6_MOSFET_BANK_1 R7_MOSFET_BANK_1 R8_MOSFET_BANK_1 R11_MOSFET_BANK_1 R12_MOSFET_BANK_1 R13_MOSFET_BANK_1 R14_MOSFET_BANK_1 R15_MOSFET_BANK_1 R16_MOSFET_BANK_1 R17_MOSFET_BANK_1 R18_MOSFET_BANK_1 R19_MOSFET_BANK_1 R20_MOSFET_BANK_1 R21_MOSFET_BANK_1 R22_MOSFET_BANK_1 R23_MOSFET_BANK_1 R24_MOSFET_BANK_1 R25_MOSFET_BANK_1 U1_MOSFET_BANK_1 U2_MOSFET_BANK_1 U3_MOSFET_BANK_1 U4_MOSFET_BANK_1 U5_MOSFET_BANK_1 U6_MOSFET_BANK_1
component class MOSFET_BANK_0: C1_MOSFET_BANK_0 C2_MOSFET_BANK_0 C3_MOSFET_BANK_0 C4_MOSFET_BANK_0 C5_MOSFET_BANK_0 C6_MOSFET_BANK_0 C7_MOSFET_BANK_0 D41_MOSFET_BANK_0 D42_MOSFET_BANK_0 D43_MOSFET_BANK_0 D44_MOSFET_BANK_0 F2_MOSFET_BANK_0 F3_MOSFET_BANK_0 F4_MOSFET_BANK_0 F5_MOSFET_BANK_0 R1_MOSFET_BANK_0 R2_MOSFET_BANK_0 R3_MOSFET_BANK_0 R4_MOSFET_BANK_0 R5_MOSFET_BANK_0 R6_MOSFET_BANK_0 R7_MOSFET_BANK_0 R8_MOSFET_BANK_0 R11_MOSFET_BANK_0 R12_MOSFET_BANK_0 R13_MOSFET_BANK_0 R14_MOSFET_BANK_0 R15_MOSFET_BANK_0 R16_MOSFET_BANK_0 R17_MOSFET_BANK_0 R18_MOSFET_BANK_0 R19_MOSFET_BANK_0 R20_MOSFET_BANK_0 R21_MOSFET_BANK_0 R22_MOSFET_BANK_0 R23_MOSFET_BANK_0 R24_MOSFET_BANK_0 R25_MOSFET_BANK_0 U1_MOSFET_BANK_0 U2_MOSFET_BANK_0 U3_MOSFET_BANK_0 U4_MOSFET_BANK_0 U5_MOSFET_BANK_0 U6_MOSFET_BANK_0
component class MCU_0: C18 C19 C20 C21 C22 C23 C24 C25 C26 C27 C28 C29 C30 C31 C32 C33 C34 C35 C36 C37 C38 C39 D4 D5 FB1 J4 R38 R39 R40 R41 R42 R43 R44 R45 R46 SW2 SW3 U10 Y1 Y2
component class BCM_ECU: F1 F8 F9 F11 F13 J1 J2 R9 R10 R67 R68 R70 R71 XF1
component class BYPASS_3: D7_BYPASS_3 F6_BYPASS_3 Q7_BYPASS_3 Q8_BYPASS_3 R54_BYPASS_3 R55_BYPASS_3 R56_BYPASS_3 R57_BYPASS_3 R58_BYPASS_3 R59_BYPASS_3
component class BYPASS_2: D7_BYPASS_2 F6_BYPASS_2 Q7_BYPASS_2 Q8_BYPASS_2 R54_BYPASS_2 R55_BYPASS_2 R56_BYPASS_2 R57_BYPASS_2 R58_BYPASS_2 R59_BYPASS_2
component class BYPASS_1: D7_BYPASS_1 F6_BYPASS_1 Q7_BYPASS_1 Q8_BYPASS_1 R54_BYPASS_1 R55_BYPASS_1 R56_BYPASS_1 R57_BYPASS_1 R58_BYPASS_1 R59_BYPASS_1
component class BYPASS_0: D7_BYPASS_0 F6_BYPASS_0 Q7_BYPASS_0 Q8_BYPASS_0 R54_BYPASS_0 R55_BYPASS_0 R56_BYPASS_0 R57_BYPASS_0 R58_BYPASS_0 R59_BYPASS_0
component class ADC_0: C49_ADC_0 C50_ADC_0 C51_ADC_0 D26_ADC_0 D27_ADC_0 D28_ADC_0 D29_ADC_0 D30_ADC_0 D31_ADC_0 D32_ADC_0 D33_ADC_0 R60_ADC_0 R61_ADC_0 R62_ADC_0 U13_ADC_0
differential pair CAN: +CAN_P -CAN_N
differential pair X: +X_P -X_N
differential pair X32: +X32_P -X32_N
differential pair PRE_CAN: +PRE_CAN_P -PRE_CAN_N

## Components (designator, comment, footprint, x,y, rotation, side; value= is the part's Value field where it differs from the comment)
C1_MOSFET_BANK_0 "100n" FP-0402-L_1_0_0_05-W_0_5-IPC_A 87.5,62 r0 top (schematic designator C1)
C1_MOSFET_BANK_1 "100n" FP-0402-L_1_0_0_05-W_0_5-IPC_A 87.5,46 r0 top (schematic designator C1)
C1_MOSFET_BANK_2 "100n" FP-0402-L_1_0_0_05-W_0_5-IPC_A 87.5,30 r0 top (schematic designator C1)
C1_MOSFET_BANK_3 "100n" FP-0402-L_1_0_0_05-W_0_5-IPC_A 87.5,14 r0 top (schematic designator C1)
C2_MOSFET_BANK_0 "100n" FP-0402-L_1_0_0_05-W_0_5-IPC_A 87.5,55 r0 top (schematic designator C2)
C2_MOSFET_BANK_1 "100n" FP-0402-L_1_0_0_05-W_0_5-IPC_A 87.5,39 r0 top (schematic designator C2)
C2_MOSFET_BANK_2 "100n" FP-0402-L_1_0_0_05-W_0_5-IPC_A 87.5,23 r0 top (schematic designator C2)
C2_MOSFET_BANK_3 "100n" FP-0402-L_1_0_0_05-W_0_5-IPC_A 87.5,7 r0 top (schematic designator C2)
C3_MOSFET_BANK_0 "100n" FP-0402-L_1_0_0_05-W_0_5-IPC_A 87.5,58 r0 bottom (schematic designator C3)
C3_MOSFET_BANK_1 "100n" FP-0402-L_1_0_0_05-W_0_5-IPC_A 87.5,42 r0 bottom (schematic designator C3)
C3_MOSFET_BANK_2 "100n" FP-0402-L_1_0_0_05-W_0_5-IPC_A 87.5,26 r0 bottom (schematic designator C3)
C3_MOSFET_BANK_3 "100n" FP-0402-L_1_0_0_05-W_0_5-IPC_A 87.5,10 r0 bottom (schematic designator C3)
C4_MOSFET_BANK_0 "100n" FP-0402-L_1_0_0_05-W_0_5-IPC_A 87.5,51 r0 bottom (schematic designator C4)
C4_MOSFET_BANK_1 "100n" FP-0402-L_1_0_0_05-W_0_5-IPC_A 87.5,35 r0 bottom (schematic designator C4)
C4_MOSFET_BANK_2 "100n" FP-0402-L_1_0_0_05-W_0_5-IPC_A 87.5,19 r0 bottom (schematic designator C4)
C4_MOSFET_BANK_3 "100n" FP-0402-L_1_0_0_05-W_0_5-IPC_A 87.5,3 r0 bottom (schematic designator C4)
C5_MOSFET_BANK_0 "100n" FP-0402-L_1_0_0_05-W_0_5-IPC_A 71.5,58 r0 bottom (schematic designator C5)
C5_MOSFET_BANK_1 "100n" FP-0402-L_1_0_0_05-W_0_5-IPC_A 71.5,42 r0 bottom (schematic designator C5)
C5_MOSFET_BANK_2 "100n" FP-0402-L_1_0_0_05-W_0_5-IPC_A 71.5,26 r0 bottom (schematic designator C5)
C5_MOSFET_BANK_3 "100n" FP-0402-L_1_0_0_05-W_0_5-IPC_A 71.5,10 r0 bottom (schematic designator C5)
C6_MOSFET_BANK_0 "100n" FP-0402-L_1_0_0_05-W_0_5-IPC_A 68.5,50.25 r180 bottom (schematic designator C6)
C6_MOSFET_BANK_1 "100n" FP-0402-L_1_0_0_05-W_0_5-IPC_A 68.5,34.25 r180 bottom (schematic designator C6)
C6_MOSFET_BANK_2 "100n" FP-0402-L_1_0_0_05-W_0_5-IPC_A 68.5,18.25 r180 bottom (schematic designator C6)
C6_MOSFET_BANK_3 "100n" FP-0402-L_1_0_0_05-W_0_5-IPC_A 68.5,2.25 r180 bottom (schematic designator C6)
C7_MOSFET_BANK_0 "100n" FP-0402-L_1_0_0_05-W_0_5-IPC_A 68.5,53 r180 bottom (schematic designator C7)
C7_MOSFET_BANK_1 "100n" FP-0402-L_1_0_0_05-W_0_5-IPC_A 68.5,37 r180 bottom (schematic designator C7)
C7_MOSFET_BANK_2 "100n" FP-0402-L_1_0_0_05-W_0_5-IPC_A 68.5,21 r180 bottom (schematic designator C7)
C7_MOSFET_BANK_3 "100n" FP-0402-L_1_0_0_05-W_0_5-IPC_A 68.5,5 r180 bottom (schematic designator C7)
C8 "100n" FP-0402-L_1_0_0_05-W_0_5-IPC_A 86,98 r180 bottom
C9 "100n" FP-0402-L_1_0_0_05-W_0_5-IPC_A 38.5,34 r0 top
C10 "100n" FP-0402-L_1_0_0_05-W_0_5-IPC_A 36,34 r180 top
C11 "100n" FP-0402-L_1_0_0_05-W_0_5-IPC_A 36,26 r180 top
C12 "6.6p" FP-0402-L_1_0_0_05-W_0_5-IPC_A 107,41.5 r0 bottom
C13 "100n" FP-0402-L_1_0_0_05-W_0_5-IPC_A 6.5,45 r270 bottom
C14 "6.6p" FP-0402-L_1_0_0_05-W_0_5-IPC_A 107,36.5 r180 bottom
C15 "GRM188R60J106ME47D" FP-GRM188-0_1-e0_2_0_55-IPC_A 53,71.5 r180 top
C16 "100n" FP-0402-L_1_0_0_05-W_0_5-IPC_A 56.5,71.5 r0 top
C17 "100n" FP-0402-L_1_0_0_05-W_0_5-IPC_A 43.25,34 r270 top
C18 "30p" FP-0402-L_1_0_0_05-W_0_5-IPC_A 29,44.25 r90 top
C19 "30p" FP-0402-L_1_0_0_05-W_0_5-IPC_A 29,41.25 r270 top
C20 "18p" FP-0402-L_1_0_0_05-W_0_5-IPC_A 29,35.75 r270 top
C21 "18p" FP-0402-L_1_0_0_05-W_0_5-IPC_A 29,38.25 r90 top
C22 "100n" FP-0402-L_1_0_0_05-W_0_5-IPC_A 6.5,39 r270 bottom
C23 "100n" FP-0402-L_1_0_0_05-W_0_5-IPC_A 6.5,33 r270 bottom
C24 "1u" FP-0402-L_1_0_0_05-W_0_5-IPC_A 22.25,38 r270 bottom
C25 "100n" FP-0402-L_1_0_0_05-W_0_5-IPC_A 23.75,38 r270 bottom
C26 "100n" FP-0402-L_1_0_0_05-W_0_5-IPC_A 23.75,45 r270 bottom
C27 "100n" FP-0402-L_1_0_0_05-W_0_5-IPC_A 12.25,45 r270 bottom
C28 "100n" FP-0402-L_1_0_0_05-W_0_5-IPC_A 12.25,33.5 r270 bottom
C29 "100n" FP-0402-L_1_0_0_05-W_0_5-IPC_A 23.75,33.5 r270 bottom
C30 "1u" FP-0402-L_1_0_0_05-W_0_5-IPC_A 22.25,42.75 r90 bottom
C31 "100n" FP-0402-L_1_0_0_05-W_0_5-IPC_A 23.75,42.75 r90 bottom
C32 "2.2u" FP-0402-L_1_0_0_05-W_0_5-IPC_A 15.25,45 r270 bottom
C33 "100n" FP-0402-L_1_0_0_05-W_0_5-IPC_A 13.75,45 r270 bottom
C34 "2.2u" FP-0402-L_1_0_0_05-W_0_5-IPC_A 13.75,36.25 r90 bottom
C35 "100n" FP-0402-L_1_0_0_05-W_0_5-IPC_A 12.25,36.25 r90 bottom
C36 "1u" FP-0402-L_1_0_0_05-W_0_5-IPC_A 22.25,35.75 r270 bottom
C37 "100n" FP-0402-L_1_0_0_05-W_0_5-IPC_A 23.75,35.75 r270 bottom
C38 "1u" FP-0402-L_1_0_0_05-W_0_5-IPC_A 22.25,40.5 r270 bottom
C39 "100n" FP-0402-L_1_0_0_05-W_0_5-IPC_A 23.75,40.5 r270 bottom
C40_PWR_PROT_1 "100n" FP-0402-L_1_0_0_05-W_0_5-IPC_A 54,95 r0 bottom (schematic designator C40)
C40_PWR_PROT_2 "100n" FP-0402-L_1_0_0_05-W_0_5-IPC_A 86,109 r0 bottom (schematic designator C40)
C40_PWR_PROT_3 "100n" FP-0402-L_1_0_0_05-W_0_5-IPC_A 86,123 r0 bottom (schematic designator C40)
C40_PWR_PROT_4 "100n" FP-0402-L_1_0_0_05-W_0_5-IPC_A 86,137.5 r0 bottom (schematic designator C40)
C40_PWR_PROT_5 "100n" FP-0402-L_1_0_0_05-W_0_5-IPC_A 86,151 r0 bottom (schematic designator C40)
C41 "GRM21BR61E226ME44L" FP-GRM21B-0_2-e0_2_0_7-IPC_B 63.5,80 r270 top
C42 "100n" FP-0402-L_1_0_0_05-W_0_5-IPC_A 64.5,76.75 r270 top
C43_IO_CHECKER_0 "100n" FP-0402-L_1_0_0_05-W_0_5-IPC_A 49.25,63 r180 top (schematic designator C43)
C43_IO_CHECKER_1 "100n" FP-0402-L_1_0_0_05-W_0_5-IPC_A 51.5,41.5 r90 top (schematic designator C43)
C44 "10u" FP-0402-L_1_0_0_05-W_0_5-IPC_A 3.5,139.5 r180 top
C45 "33n" FP-0402-L_1_0_0_05-W_0_5-IPC_A 15,143.5 r180 top
C46 "22201C474KAT2A" FP-2220-L_5_7_0_5-W_5_0_4-IPC_A 70,138.5 r90 bottom
C47 "22201C474KAT2A" FP-2220-L_5_7_0_5-W_5_0_4-IPC_A 76.5,138.5 r90 bottom
C48 "12061C102KAT2A" FP-1206-L_3_2_0_2-W_1_6_0-MFG 89,137 r90 bottom
C49_ADC_0 "100n" FP-0402-L_1_0_0_05-W_0_5-IPC_A 32.75,75 r180 bottom (schematic designator C49)
C49_ADC_1 "100n" FP-0402-L_1_0_0_05-W_0_5-IPC_A 42,56.75 r90 bottom (schematic designator C49)
C50_ADC_0 "100n" FP-0402-L_1_0_0_05-W_0_5-IPC_A 32.75,78.75 r180 bottom (schematic designator C50)
C50_ADC_1 "100n" FP-0402-L_1_0_0_05-W_0_5-IPC_A 45.75,56.75 r90 bottom (schematic designator C50)
C51_ADC_0 "100n" FP-0402-L_1_0_0_05-W_0_5-IPC_A 32.75,77.5 r180 bottom (schematic designator C51)
C51_ADC_1 "100n" FP-0402-L_1_0_0_05-W_0_5-IPC_A 44.5,56.75 r90 bottom (schematic designator C51)
C52 "100p" FP-0402-L_1_0_0_05-W_0_5-IPC_A 19,80.5 r90 top
C53 "CGA9P3X7S2A156M250KB" FP-CGA9P-IPC_B 17,103 r270 top
C54 "CGA9P3X7S2A156M250KB" FP-CGA9P-IPC_B 29,110.5 r90 top
C55 "CGA9P3X7S2A156M250KB" FP-CGA9P-IPC_B 23,110.5 r90 top
C56 "CGA9P3X7S2A156M250KB" FP-CGA9P-IPC_B 6,105.5 r180 top
C57 "CGA9P3X7S2A156M250KB" FP-CGA9P-IPC_B 6,105.5 r180 bottom
C58 "CGA9P3X7S2A156M250KB" FP-CGA9P-IPC_B 6,93.5 r180 top
C59 "C5750X7R2A335K230KA" FP-C5750-230-0_4-MFG 6,111.5 r180 bottom
C60 "C5750X7R2A335K230KA" FP-C5750-230-0_4-MFG 13.5,117.5 r0 top
C61 "C5750X7R2A335K230KA" FP-C5750-230-0_4-MFG 6,117.5 r180 top
C62 "C5750X7R2A335K230KA" FP-C5750-230-0_4-MFG 6,111.5 r180 top
C63 "100n" FP-0402-L_1_0_0_05-W_0_5-IPC_A 16.5,86.5 r270 top
C64 "CKG57NX5R1H226M500JH" FP-CKG57N-MFG 35,110.5 r90 top
C65 "CKG57NX5R1H226M500JH" FP-CKG57N-MFG 41,110.5 r90 top
C66 "HMK325B7105KN-T" FP-1210-L_3_2_0_3-W_2_5_0-IPC_B 41.5,103 r270 top
C67 "1u" FP-0402-L_1_0_0_05-W_0_5-IPC_A 15,86.5 r90 top
C68 "CGA9P3X7S2A156M250KB" FP-CGA9P-IPC_B 17,103 r270 bottom
C69 "CGA9P3X7S2A156M250KB" FP-CGA9P-IPC_B 29,110.5 r90 bottom
C70 "CGA9P3X7S2A156M250KB" FP-CGA9P-IPC_B 23,110.5 r90 bottom
C71 "CGA9P3X7S2A156M250KB" FP-CGA9P-IPC_B 6,93.5 r180 bottom
C72 "CGA9P3X7S2A156M250KB" FP-CGA9P-IPC_B 6,99.5 r180 top
C73 "CGA9P3X7S2A156M250KB" FP-CGA9P-IPC_B 6,99.5 r180 bottom
C74 "C5750X7R2A335K230KA" FP-C5750-230-0_4-MFG 17,110.5 r90 bottom
C75 "C5750X7R2A335K230KA" FP-C5750-230-0_4-MFG 13.5,117.5 r0 bottom
C76 "C5750X7R2A335K230KA" FP-C5750-230-0_4-MFG 6,117.5 r180 bottom
C77 "100n" FP-0402-L_1_0_0_05-W_0_5-IPC_A 45.5,44 r270 top
C78 "C0805C103K2RACTU" FP-C0805C-DN-MFG 91.5,136.5 r90 bottom value="10,000 pF"
C79 "10u" FP-0402-L_1_0_0_05-W_0_5-IPC_A 3.5,138 r180 top
C80 "33n" FP-0402-L_1_0_0_05-W_0_5-IPC_A 15,145 r180 top
C81 "33n" FP-0402-L_1_0_0_05-W_0_5-IPC_A 15,125 r180 top
C82 "33n" FP-0402-L_1_0_0_05-W_0_5-IPC_A 15,126.5 r180 top
C83 "22201C474KAT2A" FP-2220-L_5_7_0_5-W_5_0_4-IPC_A 76.5,124.5 r270 bottom
C84 "22201C474KAT2A" FP-2220-L_5_7_0_5-W_5_0_4-IPC_A 70,124.5 r270 bottom
C85 "12061C102KAT2A" FP-1206-L_3_2_0_2-W_1_6_0-MFG 89,125.5 r270 bottom
C86 "C0805C103K2RACTU" FP-C0805C-DN-MFG 91.5,126 r270 bottom value="10,000 pF"
C87 "47n" FP-0402-L_1_0_0_05-W_0_5-IPC_A 3.5,130.5 r0 top
C88 "MAL215099913E3" MAL215099913E3-Footprint-1 34,145 r0 top value=470µF
C89 "HMK325B7105KN-T" FP-1210-L_3_2_0_3-W_2_5_0-IPC_B 22,137.5 r270 top
C90 "HMK325B7105KN-T" FP-1210-L_3_2_0_3-W_2_5_0-IPC_B 22,137.5 r270 bottom
C91 "100n" FP-0402-L_1_0_0_05-W_0_5-IPC_A 3.5,142.5 r0 top
C92 "MAL215099913E3" MAL215099913E3-Footprint-1 34,125 r0 top value=470µF
C93 "HMK325B7105KN-T" FP-1210-L_3_2_0_3-W_2_5_0-IPC_B 22,132.5 r90 top
C94 "HMK325B7105KN-T" FP-1210-L_3_2_0_3-W_2_5_0-IPC_B 22,132.5 r90 bottom
C95 "100n" FP-0402-L_1_0_0_05-W_0_5-IPC_A 3.5,127.5 r0 top
C96 "12103D106KAT2A" FP-1210-L_3_3_0_4-W_2_5_0-MFG 4.5,146.5 r0 top
C97 "100n" FP-0402-L_1_0_0_05-W_0_5-IPC_A 3.5,141 r0 top
C98 "1u" FP-0402-L_1_0_0_05-W_0_5-IPC_A 3.5,129 r0 top
C99 "1u" FP-0402-L_1_0_0_05-W_0_5-IPC_A 3.5,132 r0 top
C100 "1u" FP-0402-L_1_0_0_05-W_0_5-IPC_A 3.5,133.5 r0 top
C101 "1u" FP-0402-L_1_0_0_05-W_0_5-IPC_A 3.5,124.5 r180 top
C102 "C5750X7R2A335K230KA" FP-C5750-230-0_4-MFG 17,110.5 r90 top
C103 "4.7u" FP-0402-L_1_0_0_05-W_0_5-IPC_A 13.5,86.5 r90 top
C104 "100n" FP-0402-L_1_0_0_05-W_0_5-IPC_A 9.5,122 r0 bottom
C105 "330n" FP-0402-L_1_0_0_05-W_0_5-IPC_A 13.5,75.5 r270 top
C106 "680p" FP-0402-L_1_0_0_05-W_0_5-IPC_A 16.5,75.5 r270 top
C107 "100n" FP-0402-L_1_0_0_05-W_0_5-IPC_A 18,75.5 r270 top
C108 "470p" FP-0402-L_1_0_0_05-W_0_5-IPC_A 12,75.5 r270 top
C109 "100n" FP-0402-L_1_0_0_05-W_0_5-IPC_A 54,112 r180 bottom
C110 "DNP" FP-CKG57N-MFG 35,110.5 r90 bottom
C111 "DNP" FP-CKG57N-MFG 41,110.5 r90 bottom
C112 "10u" FP-0402-L_1_0_0_05-W_0_5-IPC_A 52.5,15.5 r0 bottom
C113 "100nF" FP-0402-L_1_0_0_05-W_0_5-IPC_A 52.5,14 r0 bottom
C114 "100n" FP-0402-L_1_0_0_05-W_0_5-IPC_A 42.5,70.5 r90 bottom
C115 "100n" FP-0402-L_1_0_0_05-W_0_5-IPC_A 45,70.5 r90 bottom
C116 "100n" FP-0402-L_1_0_0_05-W_0_5-IPC_A 46.5,70.5 r90 bottom
C117 "100n" FP-0402-L_1_0_0_05-W_0_5-IPC_A 17.5,148.5 r180 bottom
C118 "12103D106KAT2A" FP-1210-L_3_3_0_4-W_2_5_0-MFG 17.5,145.2 r90 bottom
C119 "GRM21BR61E226ME44L" FP-GRM21B-0_2-e0_2_0_7-IPC_B 62.25,70.25 r90 top
C120 "GRM21BR61E226ME44L" FP-GRM21B-0_2-e0_2_0_7-IPC_B 59.25,70.25 r90 top
D1 "MMSZ5242BT1G" ONSC-SOD-123-2-425-04_V 77,84.5 r180 bottom
D2 "1N4148W-TP" FP-SOD-123-IPC_A 86,84.5 r180 bottom
D3 "ESDCAN02-2BWY" FP-SOT323-3L-MFG 107,39 r0 bottom value=3pF
D4 "150066RG54050" WL-SBCD_0606 30,26 r270 top
D5 "150066RG54050" WL-SBCD_0606 25,26 r270 top
D6_PWR_PROT_1 "DNP/MM5Z3V3T1G" ONSC-SOD-523-2-502-01_V 49.5,97.5 r90 bottom (schematic designator D6)
D6_PWR_PROT_2 "DNP/MM5Z3V3T1G" ONSC-SOD-523-2-502-01_V 81.5,111.5 r90 bottom (schematic designator D6)
D6_PWR_PROT_3 "DNP/MM5Z3V3T1G" ONSC-SOD-523-2-502-01_V 81.5,125.5 r90 bottom (schematic designator D6)
D6_PWR_PROT_4 "DNP/MM5Z3V3T1G" ONSC-SOD-523-2-502-01_V 81.5,139.5 r90 bottom (schematic designator D6)
D6_PWR_PROT_5 "DNP/MM5Z3V3T1G" ONSC-SOD-523-2-502-01_V 81.5,153.5 r90 bottom (schematic designator D6)
D7_BYPASS_0 "SK34A-LTP" SK34A-LTP-Footprint-1 83.5,67 r180 top locked (schematic designator D7)
D7_BYPASS_1 "SK34A-LTP" SK34A-LTP-Footprint-1 83.5,70.5 r180 bottom (schematic designator D7)
D7_BYPASS_2 "SK34A-LTP" SK34A-LTP-Footprint-1 83.5,74.5 r180 top locked (schematic designator D7)
D7_BYPASS_3 "SK34A-LTP" SK34A-LTP-Footprint-1 83.5,78 r180 bottom (schematic designator D7)
D8 "MM5Z3V3T1G" ONSC-SOD-523-2-502-01_V 49.25,67 r0 bottom
D9_IO_CHECKER_0 "MM5Z3V3T1G" ONSC-SOD-523-2-502-01_V 56.25,64 r90 bottom (schematic designator D9)
D9_IO_CHECKER_1 "MM5Z3V3T1G" ONSC-SOD-523-2-502-01_V 56.25,41.5 r90 bottom (schematic designator D9)
D10_IO_CHECKER_0 "MM5Z3V3T1G" ONSC-SOD-523-2-502-01_V 57.25,64 r90 bottom (schematic designator D10)
D10_IO_CHECKER_1 "MM5Z3V3T1G" ONSC-SOD-523-2-502-01_V 57.25,41.5 r90 bottom (schematic designator D10)
D11_IO_CHECKER_0 "MM5Z3V3T1G" ONSC-SOD-523-2-502-01_V 58.25,64 r90 bottom (schematic designator D11)
D11_IO_CHECKER_1 "MM5Z3V3T1G" ONSC-SOD-523-2-502-01_V 58.25,41.5 r90 bottom (schematic designator D11)
D12_IO_CHECKER_0 "MM5Z3V3T1G" ONSC-SOD-523-2-502-01_V 59.25,64 r90 bottom (schematic designator D12)
D12_IO_CHECKER_1 "MM5Z3V3T1G" ONSC-SOD-523-2-502-01_V 59.25,41.5 r90 bottom (schematic designator D12)
D13_IO_CHECKER_0 "MM5Z3V3T1G" ONSC-SOD-523-2-502-01_V 53.25,64 r90 bottom (schematic designator D13)
D13_IO_CHECKER_1 "MM5Z3V3T1G" ONSC-SOD-523-2-502-01_V 53.25,41.5 r90 bottom (schematic designator D13)
D14_IO_CHECKER_0 "MM5Z3V3T1G" ONSC-SOD-523-2-502-01_V 54.25,64 r90 bottom (schematic designator D14)
D14_IO_CHECKER_1 "MM5Z3V3T1G" ONSC-SOD-523-2-502-01_V 54.25,41.5 r90 bottom (schematic designator D14)
D15_IO_CHECKER_0 "MM5Z3V3T1G" ONSC-SOD-523-2-502-01_V 55.25,64 r90 bottom (schematic designator D15)
D15_IO_CHECKER_1 "MM5Z3V3T1G" ONSC-SOD-523-2-502-01_V 55.25,41.5 r90 bottom (schematic designator D15)
D16_IO_CHECKER_0 "MM5Z3V3T1G" ONSC-SOD-523-2-502-01_V 56.25,48 r270 bottom (schematic designator D16)
D16_IO_CHECKER_1 "MM5Z3V3T1G" ONSC-SOD-523-2-502-01_V 56.25,25.5 r270 bottom (schematic designator D16)
D17_IO_CHECKER_0 "MM5Z3V3T1G" ONSC-SOD-523-2-502-01_V 55.25,48 r270 bottom (schematic designator D17)
D17_IO_CHECKER_1 "MM5Z3V3T1G" ONSC-SOD-523-2-502-01_V 55.25,25.5 r270 bottom (schematic designator D17)
D18_IO_CHECKER_0 "MM5Z3V3T1G" ONSC-SOD-523-2-502-01_V 54.25,48 r270 bottom (schematic designator D18)
D18_IO_CHECKER_1 "MM5Z3V3T1G" ONSC-SOD-523-2-502-01_V 54.25,25.5 r270 bottom (schematic designator D18)
D19_IO_CHECKER_0 "MM5Z3V3T1G" ONSC-SOD-523-2-502-01_V 53.25,48 r270 bottom (schematic designator D19)
D19_IO_CHECKER_1 "MM5Z3V3T1G" ONSC-SOD-523-2-502-01_V 53.25,25.5 r270 bottom (schematic designator D19)
D20_IO_CHECKER_0 "MM5Z3V3T1G" ONSC-SOD-523-2-502-01_V 59.25,48 r270 bottom (schematic designator D20)
D20_IO_CHECKER_1 "MM5Z3V3T1G" ONSC-SOD-523-2-502-01_V 59.25,25.5 r270 bottom (schematic designator D20)
D21_IO_CHECKER_0 "MM5Z3V3T1G" ONSC-SOD-523-2-502-01_V 58.25,48 r270 bottom (schematic designator D21)
D21_IO_CHECKER_1 "MM5Z3V3T1G" ONSC-SOD-523-2-502-01_V 58.25,25.5 r270 bottom (schematic designator D21)
D22_IO_CHECKER_0 "MM5Z3V3T1G" ONSC-SOD-523-2-502-01_V 57.25,48 r270 bottom (schematic designator D22)
D22_IO_CHECKER_1 "MM5Z3V3T1G" ONSC-SOD-523-2-502-01_V 57.25,25.5 r270 bottom (schematic designator D22)
D23 "DNP/MM5Z3V3T1G" ONSC-SOD-523-2-502-01_V 58.5,109.5 r270 bottom
D24 "TVU1240R1ADG" CAF-50P250X100-10N 50.5,18 r270 bottom
D25 "TVU1240R1ADG" CAF-50P250X100-10N 54.5,18 r270 bottom
D26_ADC_0 "MM5Z3V3T1G" ONSC-SOD-523-2-502-01_V 36.5,78.5 r180 bottom (schematic designator D26)
D26_ADC_1 "MM5Z3V3T1G" ONSC-SOD-523-2-502-01_V 45.5,53 r90 bottom (schematic designator D26)
D27_ADC_0 "MM5Z3V3T1G" ONSC-SOD-523-2-502-01_V 36.5,77.5 r180 bottom (schematic designator D27)
D27_ADC_1 "MM5Z3V3T1G" ONSC-SOD-523-2-502-01_V 44.5,53 r90 bottom (schematic designator D27)
D28_ADC_0 "MM5Z3V3T1G" ONSC-SOD-523-2-502-01_V 36.5,76.5 r180 bottom (schematic designator D28)
D28_ADC_1 "MM5Z3V3T1G" ONSC-SOD-523-2-502-01_V 43.5,53 r90 bottom (schematic designator D28)
D29_ADC_0 "MM5Z3V3T1G" ONSC-SOD-523-2-502-01_V 36.5,75.5 r180 bottom (schematic designator D29)
D29_ADC_1 "MM5Z3V3T1G" ONSC-SOD-523-2-502-01_V 42.5,53 r90 bottom (schematic designator D29)
D30_ADC_0 "MM5Z3V3T1G" ONSC-SOD-523-2-502-01_V 30.5,75.5 r0 bottom (schematic designator D30)
D30_ADC_1 "MM5Z3V3T1G" ONSC-SOD-523-2-502-01_V 42.5,59 r270 bottom (schematic designator D30)
D31_ADC_0 "MM5Z3V3T1G" ONSC-SOD-523-2-502-01_V 30.5,76.5 r0 bottom (schematic designator D31)
D31_ADC_1 "MM5Z3V3T1G" ONSC-SOD-523-2-502-01_V 43.5,59 r270 bottom (schematic designator D31)
D32_ADC_0 "MM5Z3V3T1G" ONSC-SOD-523-2-502-01_V 30.5,77.5 r0 bottom (schematic designator D32)
D32_ADC_1 "MM5Z3V3T1G" ONSC-SOD-523-2-502-01_V 44.5,59 r270 bottom (schematic designator D32)
D33_ADC_0 "MM5Z3V3T1G" ONSC-SOD-523-2-502-01_V 30.5,78.5 r0 bottom (schematic designator D33)
D33_ADC_1 "MM5Z3V3T1G" ONSC-SOD-523-2-502-01_V 45.5,59 r270 bottom (schematic designator D33)
D34 "MM5Z3V3T1G" ONSC-SOD-523-2-502-01_V 49.25,66 r0 bottom
D35 "MM5Z3V3T1G" ONSC-SOD-523-2-502-01_V 49.25,65 r0 bottom
D36 "MM5Z3V3T1G" ONSC-SOD-523-2-502-01_V 49.25,64 r0 bottom
D37 "MM5Z3V3T1G" ONSC-SOD-523-2-502-01_V 49.25,71 r0 bottom
D38 "MM5Z3V3T1G" ONSC-SOD-523-2-502-01_V 49.25,70 r0 bottom
D39 "MM5Z3V3T1G" ONSC-SOD-523-2-502-01_V 49.25,69 r0 bottom
D40 "MM5Z3V3T1G" ONSC-SOD-523-2-502-01_V 49.25,68 r0 bottom
D41_MOSFET_BANK_0 "MM5Z3V3T1G" ONSC-SOD-523-2-502-01_V 87.5,63.5 r0 top (schematic designator D41)
D41_MOSFET_BANK_1 "MM5Z3V3T1G" ONSC-SOD-523-2-502-01_V 92.5,45 r270 top (schematic designator D41)
D41_MOSFET_BANK_2 "MM5Z3V3T1G" ONSC-SOD-523-2-502-01_V 92.5,29 r270 top (schematic designator D41)
D41_MOSFET_BANK_3 "MM5Z3V3T1G" ONSC-SOD-523-2-502-01_V 92.5,13 r270 top (schematic designator D41)
D42_MOSFET_BANK_0 "MM5Z3V3T1G" ONSC-SOD-523-2-502-01_V 92.5,59 r90 bottom (schematic designator D42)
D42_MOSFET_BANK_1 "MM5Z3V3T1G" ONSC-SOD-523-2-502-01_V 92.5,43 r90 bottom (schematic designator D42)
D42_MOSFET_BANK_2 "MM5Z3V3T1G" ONSC-SOD-523-2-502-01_V 92.5,27 r90 bottom (schematic designator D42)
D42_MOSFET_BANK_3 "MM5Z3V3T1G" ONSC-SOD-523-2-502-01_V 92.5,11 r90 bottom (schematic designator D42)
D43_MOSFET_BANK_0 "MM5Z3V3T1G" ONSC-SOD-523-2-502-01_V 92.5,54 r270 top (schematic designator D43)
D43_MOSFET_BANK_1 "MM5Z3V3T1G" ONSC-SOD-523-2-502-01_V 92.5,38 r270 top (schematic designator D43)
D43_MOSFET_BANK_2 "MM5Z3V3T1G" ONSC-SOD-523-2-502-01_V 92.5,22 r270 top (schematic designator D43)
D43_MOSFET_BANK_3 "MM5Z3V3T1G" ONSC-SOD-523-2-502-01_V 92.5,6 r270 top (schematic designator D43)
D44_MOSFET_BANK_0 "MM5Z3V3T1G" ONSC-SOD-523-2-502-01_V 92.5,52 r90 bottom (schematic designator D44)
D44_MOSFET_BANK_1 "MM5Z3V3T1G" ONSC-SOD-523-2-502-01_V 92.5,36 r90 bottom (schematic designator D44)
D44_MOSFET_BANK_2 "MM5Z3V3T1G" ONSC-SOD-523-2-502-01_V 92.5,20 r90 bottom (schematic designator D44)
D44_MOSFET_BANK_3 "MM5Z3V3T1G" ONSC-SOD-523-2-502-01_V 92.5,4 r90 bottom (schematic designator D44)
D45 "DNP/MM5Z3V3T1G" ONSC-SOD-523-2-502-01_V 81,101 r180 bottom
D46 "DNP/MM5Z3V3T1G" ONSC-SOD-523-2-502-01_V 57,69 r270 top
D47 "DNP/MM5Z3V3T1G" ONSC-SOD-523-2-502-01_V 49,75 r90 top
F1 "0ZCH0075AF2E" 0ZCH0075AF2E-Footprint-1 67,80 r270 top
F2_MOSFET_BANK_0 "0466003.NR" FP-0466-MFG 89,57.5 r0 top value=0.019Ω (schematic designator F2)
F2_MOSFET_BANK_1 "0466003.NR" FP-0466-MFG 89,41.5 r0 top value=0.019Ω (schematic designator F2)
F2_MOSFET_BANK_2 "0466003.NR" FP-0466-MFG 89,25.5 r0 top value=0.019Ω (schematic designator F2)
F2_MOSFET_BANK_3 "0466003.NR" FP-0466-MFG 89,9.5 r0 top value=0.019Ω (schematic designator F2)
F3_MOSFET_BANK_0 "0466003.NR" FP-0466-MFG 89,62.5 r0 bottom value=0.019Ω (schematic designator F3)
F3_MOSFET_BANK_1 "0466003.NR" FP-0466-MFG 89,46.5 r0 bottom value=0.019Ω (schematic designator F3)
F3_MOSFET_BANK_2 "0466003.NR" FP-0466-MFG 89,30.5 r0 bottom value=0.019Ω (schematic designator F3)
F3_MOSFET_BANK_3 "0466003.NR" FP-0466-MFG 89,14.5 r0 bottom value=0.019Ω (schematic designator F3)
F4_MOSFET_BANK_0 "0466003.NR" FP-0466-MFG 89,50.5 r0 top value=0.019Ω (schematic designator F4)
F4_MOSFET_BANK_1 "0466003.NR" FP-0466-MFG 89,34.5 r0 top value=0.019Ω (schematic designator F4)
F4_MOSFET_BANK_2 "0466003.NR" FP-0466-MFG 89,18.5 r0 top value=0.019Ω (schematic designator F4)
F4_MOSFET_BANK_3 "0466003.NR" FP-0466-MFG 89,2.5 r0 top value=0.019Ω (schematic designator F4)
F5_MOSFET_BANK_0 "0466003.NR" FP-0466-MFG 89,55.5 r0 bottom value=0.019Ω (schematic designator F5)
F5_MOSFET_BANK_1 "0466003.NR" FP-0466-MFG 89,39.5 r0 bottom value=0.019Ω (schematic designator F5)
F5_MOSFET_BANK_2 "0466003.NR" FP-0466-MFG 89,23.5 r0 bottom value=0.019Ω (schematic designator F5)
F5_MOSFET_BANK_3 "0466003.NR" FP-0466-MFG 89,7.5 r0 bottom value=0.019Ω (schematic designator F5)
F6_BYPASS_0 "0466003.NR" FP-0466-MFG 77.5,67 r0 top locked value=0.019Ω (schematic designator F6)
F6_BYPASS_1 "0466003.NR" FP-0466-MFG 77.5,70.5 r0 bottom value=0.019Ω (schematic designator F6)
F6_BYPASS_2 "0466003.NR" FP-0466-MFG 77.5,74.5 r0 top locked value=0.019Ω (schematic designator F6)
F6_BYPASS_3 "0466003.NR" FP-0466-MFG 77.5,78 r0 bottom value=0.019Ω (schematic designator F6)
F7 "MF-PSMF020X-2" FP-MF-PSMF-MFG 47,10.5 r270 bottom value=0.65-3.5Ω
F8 "MF-PSMF020X-2" FP-MF-PSMF-MFG 60,74.5 r90 bottom value=0.65-3.5Ω
F9 "MF-PSMF020X-2" FP-MF-PSMF-MFG 63.25,70.5 r270 bottom value=0.65-3.5Ω
F11 "MF-PSMF020X-2" FP-MF-PSMF-MFG 60.75,70.5 r270 bottom value=0.65-3.5Ω
F13 "MF-PSMF020X-2" FP-MF-PSMF-MFG 65.75,70.5 r270 bottom value=0.65-3.5Ω
FB1 "BLM15PX601SN1D" FP-BLM15-0_05-IPC_A 20.75,40.5 r90 bottom
J1 "776163-1" FP-776163-1-MFG 113,39 r90 top
J2 "776163-1" FP-776163-1-MFG 113,117 r90 top
J4 "3220-10-0300-00" 3220-10-0300-00-Footprint-1 14,26 r90 top
L1 "SRF4532-510Y" FP-SRF4532-MFG 42.5,28 r270 top
L2 "74435561100" WE-HCI_1890 58.5,145 r90 top
L3 "PM5433.302NLT" PM5433.302NLT-Footprint-1 34.5,90.5 r270 top
L4 "74435561100" WE-HCI_1890 58.5,125 r90 top
L5 "NR5040T4R7N" FP-NR5040-H_4_1-MFG 60.75,75 r270 top
Q1 "SISH615ADN-T1-GE3" SISH615ADN-T1-GE3-Footprint-1 76.51,87.538 r270 bottom
Q2 "SISH615ADN-T1-GE3" SISH615ADN-T1-GE3-Footprint-1 81.01,87.538 r90 bottom
Q3 "SISH615ADN-T1-GE3" SISH615ADN-T1-GE3-Footprint-1 76.51,91.538 r270 bottom
Q4 "SISH615ADN-T1-GE3" SISH615ADN-T1-GE3-Footprint-1 81.01,91.538 r90 bottom
Q5 "BSS138W-7-F" DIOD-SOT323-3_V 76,95.5 r0 bottom
Q6 "SUD80460E-GE3" FP-T16-0236-MFG 17.244,94 r90 top
Q7_BYPASS_0 "SISH615ADN-T1-GE3" SISH615ADN-T1-GE3-Footprint-1 89.5,67 r270 top locked (schematic designator Q7)
Q7_BYPASS_1 "SISH615ADN-T1-GE3" SISH615ADN-T1-GE3-Footprint-1 89.5,70.5 r90 bottom (schematic designator Q7)
Q7_BYPASS_2 "SISH615ADN-T1-GE3" SISH615ADN-T1-GE3-Footprint-1 89.5,74.5 r270 top locked (schematic designator Q7)
Q7_BYPASS_3 "SISH615ADN-T1-GE3" SISH615ADN-T1-GE3-Footprint-1 89.5,78 r90 bottom (schematic designator Q7)
Q8_BYPASS_0 "SSM6L56FE,LM" FP-SON6-P-0_50-MFG 86,70.5 r180 top locked (schematic designator Q8)
Q8_BYPASS_1 "SSM6L56FE,LM" FP-SON6-P-0_50-MFG 86,67 r180 bottom (schematic designator Q8)
Q8_BYPASS_2 "SSM6L56FE,LM" FP-SON6-P-0_50-MFG 86,78 r180 top locked (schematic designator Q8)
Q8_BYPASS_3 "SSM6L56FE,LM" FP-SON6-P-0_50-MFG 86,74.5 r180 bottom (schematic designator Q8)
Q9 "SUD80460E-GE3" FP-T16-0236-MFG 26,103 r270 top
R1_MOSFET_BANK_0 "1k" R0603B 62.5,63 r0 top (schematic designator R1)
R1_MOSFET_BANK_1 "1k" R0603B 62.5,47 r0 top (schematic designator R1)
R1_MOSFET_BANK_2 "1k" R0603B 62.5,31 r0 top (schematic designator R1)
R1_MOSFET_BANK_3 "1k" R0603B 62.5,15 r0 top (schematic designator R1)
R2_MOSFET_BANK_0 "1k" R0603B 62.5,58.5 r0 top (schematic designator R2)
R2_MOSFET_BANK_1 "1k" R0603B 62.5,42.5 r0 top (schematic designator R2)
R2_MOSFET_BANK_2 "1k" R0603B 62.5,26.5 r0 top (schematic designator R2)
R2_MOSFET_BANK_3 "1k" R0603B 62.5,10.5 r0 top (schematic designator R2)
R3_MOSFET_BANK_0 "1k" R0603B 62.5,57 r0 top (schematic designator R3)
R3_MOSFET_BANK_1 "1k" R0603B 62.5,41 r0 top (schematic designator R3)
R3_MOSFET_BANK_2 "1k" R0603B 62.5,25 r0 top (schematic designator R3)
R3_MOSFET_BANK_3 "1k" R0603B 62.5,9 r0 top (schematic designator R3)
R4_MOSFET_BANK_0 "1k" R0603B 62.5,52.5 r0 top (schematic designator R4)
R4_MOSFET_BANK_1 "1k" R0603B 62.5,36.5 r0 top (schematic designator R4)
R4_MOSFET_BANK_2 "1k" R0603B 62.5,20.5 r0 top (schematic designator R4)
R4_MOSFET_BANK_3 "1k" R0603B 62.5,4.5 r0 top (schematic designator R4)
R5_MOSFET_BANK_0 "1k" R0603B 62.5,60 r0 top (schematic designator R5)
R5_MOSFET_BANK_1 "1k" R0603B 62.5,44 r0 top (schematic designator R5)
R5_MOSFET_BANK_2 "1k" R0603B 62.5,28 r0 top (schematic designator R5)
R5_MOSFET_BANK_3 "1k" R0603B 62.5,12 r0 top (schematic designator R5)
R6_MOSFET_BANK_0 "1k" R0603B 62.5,54 r0 top (schematic designator R6)
R6_MOSFET_BANK_1 "1k" R0603B 62.5,38 r0 top (schematic designator R6)
R6_MOSFET_BANK_2 "1k" R0603B 62.5,22 r0 top (schematic designator R6)
R6_MOSFET_BANK_3 "1k" R0603B 62.5,6 r0 top (schematic designator R6)
R7_MOSFET_BANK_0 "100k" R0603B 62.5,61.5 r180 top (schematic designator R7)
R7_MOSFET_BANK_1 "100k" R0603B 62.5,45.5 r180 top (schematic designator R7)
R7_MOSFET_BANK_2 "100k" R0603B 62.5,29.5 r180 top (schematic designator R7)
R7_MOSFET_BANK_3 "100k" R0603B 62.5,13.5 r180 top (schematic designator R7)
R8_MOSFET_BANK_0 "100k" R0603B 62.5,55.5 r180 top (schematic designator R8)
R8_MOSFET_BANK_1 "100k" R0603B 62.5,39.5 r180 top (schematic designator R8)
R8_MOSFET_BANK_2 "100k" R0603B 62.5,23.5 r180 top (schematic designator R8)
R8_MOSFET_BANK_3 "100k" R0603B 62.5,7.5 r180 top (schematic designator R8)
R9 "330" R0603B 92,108.75 r180 bottom
R10 "330" R0603B 92,110.25 r180 bottom
R11_MOSFET_BANK_0 "ERT-J1VR104FM" RESC1608X90X30ML15T20 70.5,60 r180 bottom (schematic designator R11)
R11_MOSFET_BANK_1 "ERT-J1VR104FM" RESC1608X90X30ML15T20 70.5,44 r180 bottom (schematic designator R11)
R11_MOSFET_BANK_2 "ERT-J1VR104FM" RESC1608X90X30ML15T20 70.5,28 r180 bottom (schematic designator R11)
R11_MOSFET_BANK_3 "ERT-J1VR104FM" RESC1608X90X30ML15T20 70.5,12 r180 bottom (schematic designator R11)
R12_MOSFET_BANK_0 "100k" R0603B 69.25,57.5 r90 bottom value=1k (schematic designator R12)
R12_MOSFET_BANK_1 "100k" R0603B 69.25,41.5 r90 bottom value=1k (schematic designator R12)
R12_MOSFET_BANK_2 "100k" R0603B 69.25,25.5 r90 bottom value=1k (schematic designator R12)
R12_MOSFET_BANK_3 "100k" R0603B 69.25,9.5 r90 bottom value=1k (schematic designator R12)
R13_MOSFET_BANK_0 "1k" R0603B 90,51 r180 bottom (schematic designator R13)
R13_MOSFET_BANK_1 "1k" R0603B 90,35 r180 bottom (schematic designator R13)
R13_MOSFET_BANK_2 "1k" R0603B 90,19 r180 bottom (schematic designator R13)
R13_MOSFET_BANK_3 "1k" R0603B 90,3 r180 bottom (schematic designator R13)
R14_MOSFET_BANK_0 "1k" R0603B 90,55 r180 top (schematic designator R14)
R14_MOSFET_BANK_1 "1k" R0603B 90,39 r180 top (schematic designator R14)
R14_MOSFET_BANK_2 "1k" R0603B 90,23 r180 top (schematic designator R14)
R14_MOSFET_BANK_3 "1k" R0603B 90,7 r180 top (schematic designator R14)
R15_MOSFET_BANK_0 "1k" R0603B 90,58 r180 bottom (schematic designator R15)
R15_MOSFET_BANK_1 "1k" R0603B 90,42 r180 bottom (schematic designator R15)
R15_MOSFET_BANK_2 "1k" R0603B 90,26 r180 bottom (schematic designator R15)
R15_MOSFET_BANK_3 "1k" R0603B 90,10 r180 bottom (schematic designator R15)
R16_MOSFET_BANK_0 "56" R0603B 68.5,55 r180 bottom (schematic designator R16)
R16_MOSFET_BANK_1 "56" R0603B 68.5,39 r180 bottom (schematic designator R16)
R16_MOSFET_BANK_2 "56" R0603B 68.5,23 r180 bottom (schematic designator R16)
R16_MOSFET_BANK_3 "56" R0603B 68.5,7 r180 bottom (schematic designator R16)
R17_MOSFET_BANK_0 "1k" R0603B 90,62 r180 top (schematic designator R17)
R17_MOSFET_BANK_1 "1k" R0603B 90,46 r180 top (schematic designator R17)
R17_MOSFET_BANK_2 "1k" R0603B 90,30 r180 top (schematic designator R17)
R17_MOSFET_BANK_3 "1k" R0603B 90,14 r180 top (schematic designator R17)
R18_MOSFET_BANK_0 "100k" R0603B 87.5,60 r180 top value=10k (schematic designator R18)
R18_MOSFET_BANK_1 "100k" R0603B 87.5,44 r180 top value=10k (schematic designator R18)
R18_MOSFET_BANK_2 "100k" R0603B 87.5,28 r180 top value=10k (schematic designator R18)
R18_MOSFET_BANK_3 "100k" R0603B 87.5,12 r180 top value=10k (schematic designator R18)
R19_MOSFET_BANK_0 "100k" R0603B 87.5,60 r180 bottom value=10k (schematic designator R19)
R19_MOSFET_BANK_1 "100k" R0603B 87.5,44 r180 bottom value=10k (schematic designator R19)
R19_MOSFET_BANK_2 "100k" R0603B 87.5,28 r180 bottom value=10k (schematic designator R19)
R19_MOSFET_BANK_3 "100k" R0603B 87.5,12 r180 bottom value=10k (schematic designator R19)
R20_MOSFET_BANK_0 "100k" R0603B 87.5,53 r180 top value=10k (schematic designator R20)
R20_MOSFET_BANK_1 "100k" R0603B 87.5,37 r180 top value=10k (schematic designator R20)
R20_MOSFET_BANK_2 "100k" R0603B 87.5,21 r180 top value=10k (schematic designator R20)
R20_MOSFET_BANK_3 "100k" R0603B 87.5,5 r180 top value=10k (schematic designator R20)
R21_MOSFET_BANK_0 "100k" R0603B 87.5,53 r180 bottom value=10k (schematic designator R21)
R21_MOSFET_BANK_1 "100k" R0603B 87.5,37 r180 bottom value=10k (schematic designator R21)
R21_MOSFET_BANK_2 "100k" R0603B 87.5,21 r180 bottom value=10k (schematic designator R21)
R21_MOSFET_BANK_3 "100k" R0603B 87.5,5 r180 bottom value=10k (schematic designator R21)
R22_MOSFET_BANK_0 "24k" R0603B 90,60 r0 top value=2.7k (schematic designator R22)
R22_MOSFET_BANK_1 "24k" R0603B 90,44 r0 top value=2.7k (schematic designator R22)
R22_MOSFET_BANK_2 "24k" R0603B 90,28 r0 top value=2.7k (schematic designator R22)
R22_MOSFET_BANK_3 "24k" R0603B 90,12 r0 top value=2.7k (schematic designator R22)
R23_MOSFET_BANK_0 "24k" R0603B 90,60 r0 bottom value=2.7k (schematic designator R23)
R23_MOSFET_BANK_1 "24k" R0603B 90,44 r0 bottom value=2.7k (schematic designator R23)
R23_MOSFET_BANK_2 "24k" R0603B 90,28 r0 bottom value=2.7k (schematic designator R23)
R23_MOSFET_BANK_3 "24k" R0603B 90,12 r0 bottom value=2.7k (schematic designator R23)
R24_MOSFET_BANK_0 "24k" R0603B 90,53 r0 top value=2.7k (schematic designator R24)
R24_MOSFET_BANK_1 "24k" R0603B 90,37 r0 top value=2.7k (schematic designator R24)
R24_MOSFET_BANK_2 "24k" R0603B 90,21 r0 top value=2.7k (schematic designator R24)
R24_MOSFET_BANK_3 "24k" R0603B 90,5 r0 top value=2.7k (schematic designator R24)
R25_MOSFET_BANK_0 "24k" R0603B 90,53 r0 bottom value=2.7k (schematic designator R25)
R25_MOSFET_BANK_1 "24k" R0603B 90,37 r0 bottom value=2.7k (schematic designator R25)
R25_MOSFET_BANK_2 "24k" R0603B 90,21 r0 bottom value=2.7k (schematic designator R25)
R25_MOSFET_BANK_3 "24k" R0603B 90,5 r0 bottom value=2.7k (schematic designator R25)
R26 "100k" R0603B 86,95 r180 bottom
R27 "100k" R0603B 73,84.5 r0 bottom
R28 "100k" R0603B 78.5,95.5 r270 bottom
R29 "100k" R0603B 81,98 r0 bottom
R30 "1k" R0603B 71.75,95.45 r270 bottom
R31 "24k" R0603B 81,99.5 r0 bottom
R32 "100k" R0603B 73.25,95.45 r270 bottom
R33 "100k" R0603B 5,45 r270 bottom
R34 "1k" R0603B 3.5,45 r90 bottom
R35 "60.4" R0603B 44.5,32 r0 top
R36 "100k" R0603B 42,38 r180 top value=10k
R37 "60.4" R0603B 42,32 r0 top
R38 "10k" R0603B 11.5,26 r270 bottom
R39 "330" R0603B 5,39 r270 bottom
R40 "330" R0603B 5,33 r270 bottom
R41 "100k" R0603B 3.5,39 r90 bottom value=10k
R42 "100k" R0603B 3.5,33 r90 bottom value=10k
R43 "330" R0603B 30,27 r0 bottom
R44 "330" R0603B 30,25 r0 bottom
R45 "330" R0603B 25,27 r0 bottom
R46 "330" R0603B 25,25 r0 bottom
R47_PWR_PROT_1 "100k" R0603B 49.5,95 r90 top value=10k (schematic designator R47)
R47_PWR_PROT_2 "100k" R0603B 81.5,109 r90 top value=10k (schematic designator R47)
R47_PWR_PROT_3 "100k" R0603B 81.5,123 r90 top value=10k (schematic designator R47)
R47_PWR_PROT_4 "100k" R0603B 81.5,137 r90 top value=10k (schematic designator R47)
R47_PWR_PROT_5 "100k" R0603B 81.5,151 r90 top value=10k (schematic designator R47)
R48 "24k" R0603B 55,69.5 r0 top
R49_PWR_PROT_1 "24k" R0603B 49.5,97.5 r90 top value=2.7k (schematic designator R49)
R49_PWR_PROT_2 "24k" R0603B 81.5,111.5 r90 top value=2.7k (schematic designator R49)
R49_PWR_PROT_3 "24k" R0603B 81.5,125.5 r90 top value=2.7k (schematic designator R49)
R49_PWR_PROT_4 "24k" R0603B 81.5,139.5 r90 top value=2.7k (schematic designator R49)
R49_PWR_PROT_5 "24k" R0603B 81.5,153.5 r90 top value=2.7k (schematic designator R49)
R50_PWR_PROT_1 "DNP" R0603B 54,96.5 r180 bottom value=10k (schematic designator R50)
R50_PWR_PROT_2 "DNP" R0603B 86,110.5 r180 bottom value=10k (schematic designator R50)
R50_PWR_PROT_3 "DNP" R0603B 86,124.5 r180 bottom value=10k (schematic designator R50)
R50_PWR_PROT_4 "DNP" R0603B 86,139 r180 bottom value=10k (schematic designator R50)
R50_PWR_PROT_5 "DNP" R0603B 86,152.5 r180 bottom value=10k (schematic designator R50)
R51 "100k" R0603B 55,68 r180 top
R52_PWR_PROT_1 "1k" R0603B 54,98 r180 bottom (schematic designator R52)
R52_PWR_PROT_2 "1k" R0603B 86,112 r180 bottom (schematic designator R52)
R52_PWR_PROT_3 "1k" R0603B 86,121.5 r180 bottom (schematic designator R52)
R52_PWR_PROT_4 "1k" R0603B 86,140.5 r180 bottom (schematic designator R52)
R52_PWR_PROT_5 "1k" R0603B 81,151 r0 bottom (schematic designator R52)
R53 "100k" R0603B 39,38 r0 top value=10k
R54_BYPASS_0 "100k" R0603B 90,70.5 r90 top locked (schematic designator R54)
R54_BYPASS_1 "100k" R0603B 90,67 r270 bottom (schematic designator R54)
R54_BYPASS_2 "100k" R0603B 90,78 r90 top locked (schematic designator R54)
R54_BYPASS_3 "100k" R0603B 90,74.5 r270 bottom (schematic designator R54)
R55_BYPASS_0 "1k" R0603B 88.5,70.5 r270 top locked (schematic designator R55)
R55_BYPASS_1 "1k" R0603B 88.5,67 r90 bottom (schematic designator R55)
R55_BYPASS_2 "1k" R0603B 88.5,78 r270 top locked (schematic designator R55)
R55_BYPASS_3 "1k" R0603B 88.5,74.5 r90 bottom (schematic designator R55)
R56_BYPASS_0 "1k" R0603B 83.5,70 r0 top locked (schematic designator R56)
R56_BYPASS_1 "1k" R0603B 83.5,67.5 r0 bottom (schematic designator R56)
R56_BYPASS_2 "1k" R0603B 83.5,77.5 r0 top locked (schematic designator R56)
R56_BYPASS_3 "1k" R0603B 83.5,75 r0 bottom (schematic designator R56)
R57_BYPASS_0 "100k" R0603B 81,70 r180 top locked (schematic designator R57)
R57_BYPASS_1 "100k" R0603B 81,67.5 r180 bottom (schematic designator R57)
R57_BYPASS_2 "100k" R0603B 81,77.5 r180 top locked (schematic designator R57)
R57_BYPASS_3 "100k" R0603B 81,75 r180 bottom (schematic designator R57)
R58_BYPASS_0 "1k" R0603B 83.5,71.5 r0 top locked (schematic designator R58)
R58_BYPASS_1 "1k" R0603B 83.5,66 r0 bottom (schematic designator R58)
R58_BYPASS_2 "1k" R0603B 83.5,79 r0 top locked (schematic designator R58)
R58_BYPASS_3 "1k" R0603B 83.5,73.5 r0 bottom (schematic designator R58)
R59_BYPASS_0 "100k" R0603B 81,71.5 r0 top locked (schematic designator R59)
R59_BYPASS_1 "100k" R0603B 81,66 r0 bottom (schematic designator R59)
R59_BYPASS_2 "100k" R0603B 81,79 r0 top locked (schematic designator R59)
R59_BYPASS_3 "100k" R0603B 81,73.5 r0 bottom (schematic designator R59)
R60_ADC_0 "56" R0603B 34.75,78 r90 bottom (schematic designator R60)
R60_ADC_1 "56" R0603B 45,54.75 r0 bottom (schematic designator R60)
R61_ADC_0 "CAY16-102J4LF" BOUR-CAY16-J4_V 40.5,77 r180 top (schematic designator R61)
R61_ADC_1 "CAY16-102J4LF" BOUR-CAY16-J4_V 44,49 r90 top (schematic designator R61)
R62_ADC_0 "CAY16-102J4LF" BOUR-CAY16-J4_V 26.5,77 r0 top (schematic designator R62)
R62_ADC_1 "CAY16-102J4LF" BOUR-CAY16-J4_V 44,63 r270 top (schematic designator R62)
R63 "1k" R0603B 86,96.5 r0 bottom
R64 "CAY16-102J4LF" BOUR-CAY16-J4_V 49.25,65.75 r180 top
R65 "56" R0603B 46,68.5 r0 bottom
R66 "CAY16-102J4LF" BOUR-CAY16-J4_V 49.25,69.5 r180 top
R67 "10k" R0603B 48,41.5 r90 top value=100k
R68 "10k" R0603B 49.5,41.5 r90 top value=100k
R69 "1k" R0603B 78.5,98.25 r90 bottom
R70 "330" R0603B 92,142 r180 bottom
R71 "330" R0603B 92,143.5 r180 bottom
R85 "KRL6432E-M-R002-G-T1" FP-KRL6432E-MFG 35.5,103 r270 top
R86 "100" R0603B 21,80.5 r90 top value=330
R87 "1k" R0603B 10.5,83 r180 top value=330
R88 "DNP" R0603B 9.5,123.5 r180 bottom value=330
R89 "0402 JUMPER" RESC1005X40X25ML05T05 12,86.5 r90 top
R90 "3.16k" R0603B 17,78 r0 top value=330
R92 "5.76k" R0603B 14,78 r0 top value=330
R93 "50k" R0603B 10.5,81 r180 top value=330
R94 "28.7k" R0603B 15,75.5 r270 top value=330
R95_IO_CHECKER_0 "DNP" R0603B 51,49.5 r0 top value=100k (schematic designator R95)
R95_IO_CHECKER_1 "DNP" R0603B 51,27 r0 top value=100k (schematic designator R95)
R96_IO_CHECKER_0 "DNP" R0603B 51,48 r0 top value=100k (schematic designator R96)
R96_IO_CHECKER_1 "DNP" R0603B 51,25.5 r0 top value=100k (schematic designator R96)
R97_IO_CHECKER_0 "DNP" R0603B 51,46.5 r0 top value=100k (schematic designator R97)
R97_IO_CHECKER_1 "DNP" R0603B 51,24 r0 top value=100k (schematic designator R97)
R98_IO_CHECKER_0 "CAY16-102J4LF" BOUR-CAY16-J4_V 58,64 r270 top (schematic designator R98)
R98_IO_CHECKER_1 "CAY16-102J4LF" BOUR-CAY16-J4_V 58,41.5 r270 top (schematic designator R98)
R99_IO_CHECKER_0 "CAY16-102J4LF" BOUR-CAY16-J4_V 54.5,64 r270 top (schematic designator R99)
R99_IO_CHECKER_1 "CAY16-102J4LF" BOUR-CAY16-J4_V 54.5,41.5 r270 top (schematic designator R99)
R100_IO_CHECKER_0 "CAY16-102J4LF" BOUR-CAY16-J4_V 54.5,48 r90 top (schematic designator R100)